# EAGLE board main_board (EAGLE 9.6.2), part 1 of 2
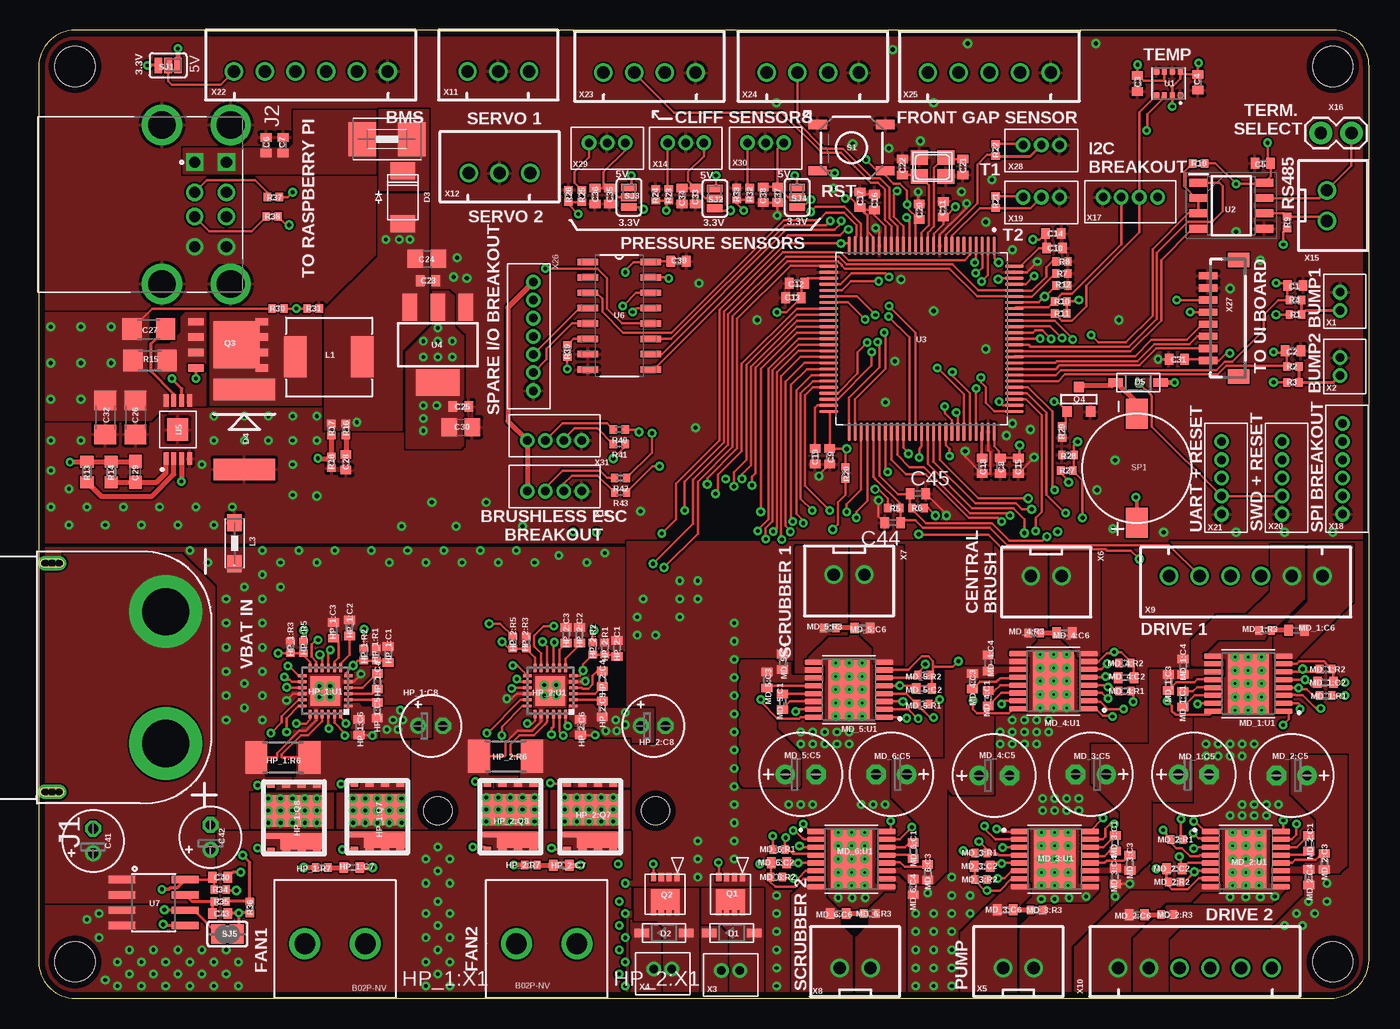
[diagram p0: board, top side]
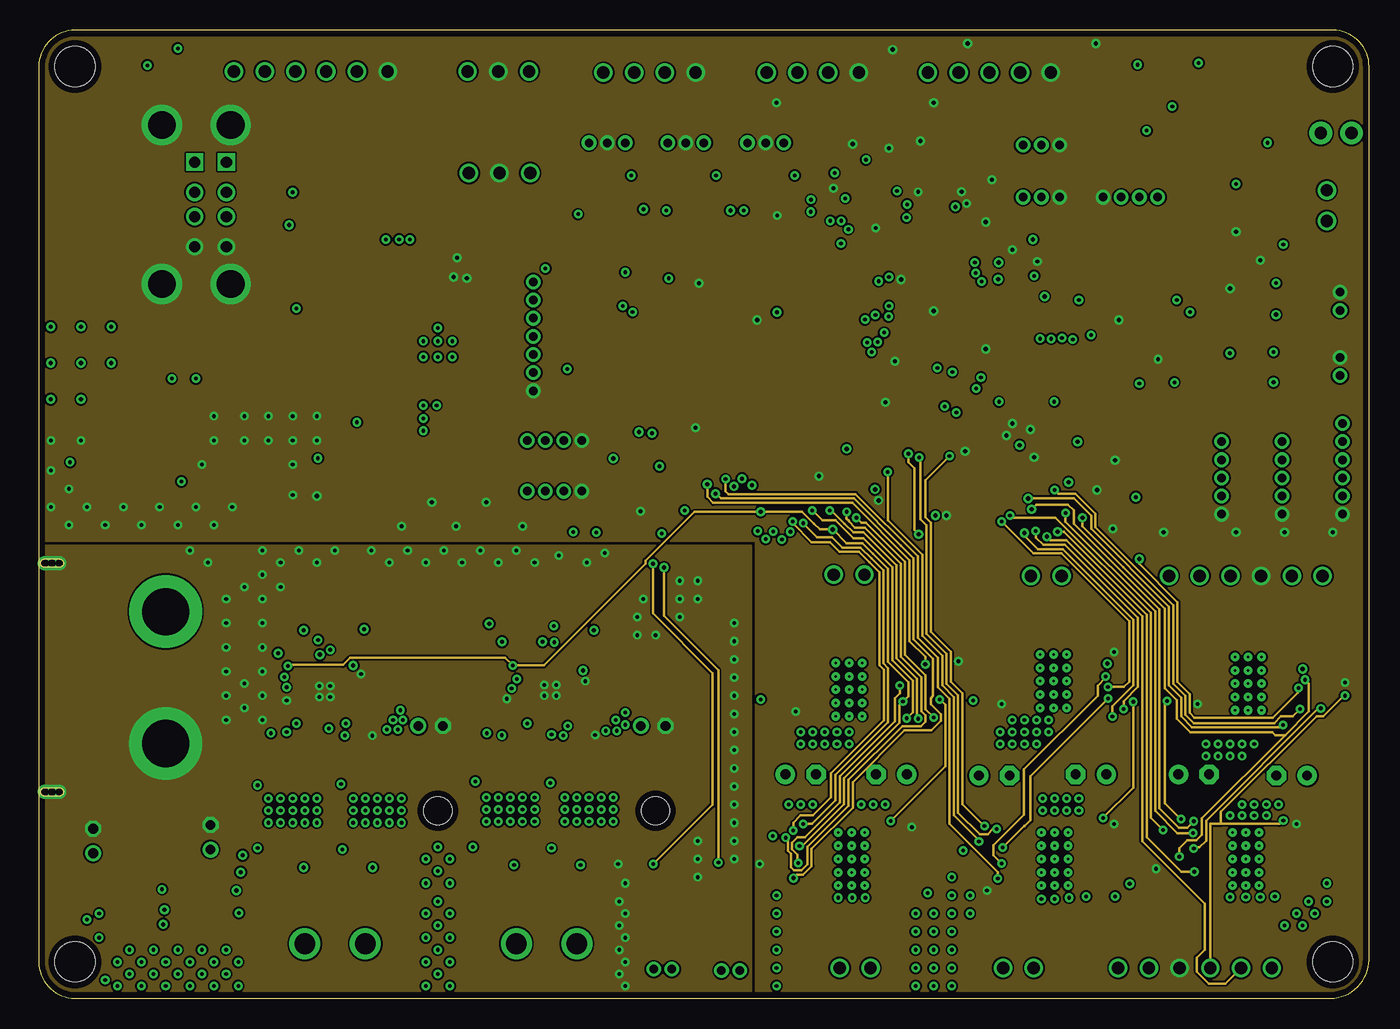
[diagram p1: board, inner layer L2_GND]
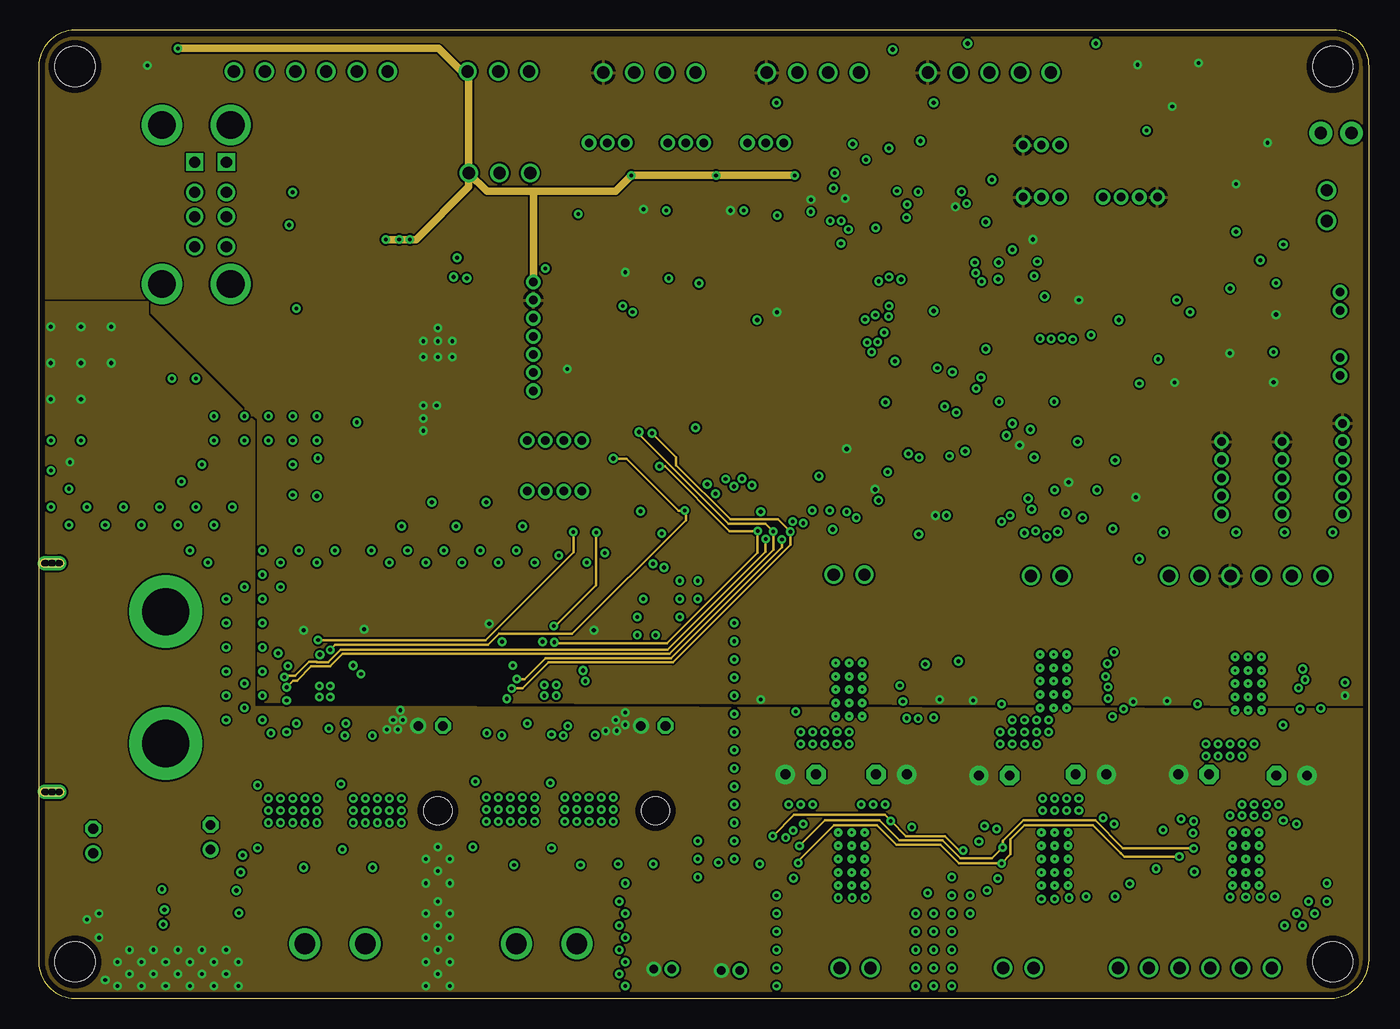
[diagram p2: board, inner layer L3_VCC]
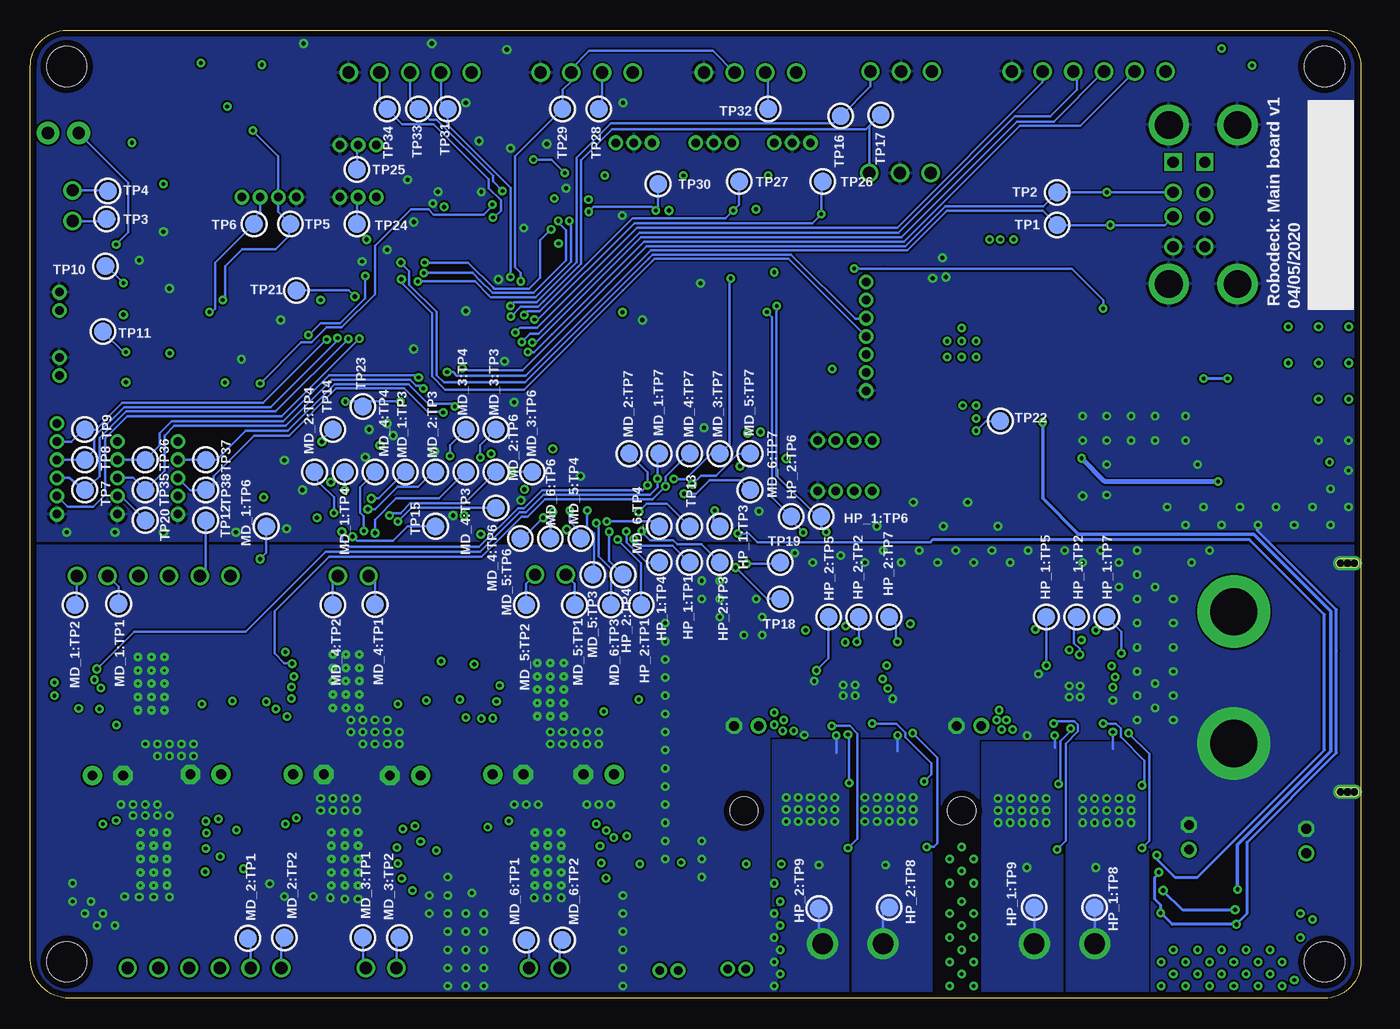
[diagram p3: board, bottom side, seen from below]

Size 110.01 x 80.01 mm. Coordinates in mm from the lower left corner, seen from the top.
Outline: 0,77.01 0,3.01 arc90 3,0.01 106.5,0.01 arc99 110,3.51 110,77.01 arc90 107,80.01 3,80.01 arc90 0,77.01
Copper layers (1+2*15+16): Top 0.035mm / dielectric 1.5mm / L2_GND 0.035mm / dielectric 0.15mm / L3_VCC 0.035mm / dielectric 0.2mm / Bottom 0.035mm
Design rules "default *": minimum track width 6mil, minimum drill 0.3mm, track to track 6mil, track to pad 6mil, pad to pad 6mil, via to via 6mil, smd to smd 6mil, copper to edge 20mil, drill to drill 6mil, minimum pad ring 10mil, minimum via ring 8mil, stop-mask expansion 4mil, vias tented up to drill 0.4mm, thermal gap 10mil
Holes 3.3 mm at 107,3.01 3,3.01 3,77.01 107,77.01
Holes 2.3 mm at 33,15.51 51,15.51

## Footprints (pad centres in the part's own frame; a part is rotated, then mirrored left to right if it is on the bottom)
C0402 = smd 0.7 x 0.9: 1 -0.65,0; 2 0.65,0
C0805 = smd 1.3 x 1.5: 1 -0.95,0; 2 0.95,0
C1206 = smd 1.6 x 1.8: 1 -1.4,0; 2 1.4,0
C0603 = smd 1.1 x 1: 1 -0.85,0; 2 0.85,0
E2-5 = drill 0.813 pad 1.27: + -1.016,0 | drill 0.813 pad 1.27 octagon: - 1.016,0
SOD-123 = smd 1.2 x 0.7: A 1.85,0; C -1.85,0
SOD-128 = smd 2 x 1.4: A 0,-2.2; K 0,2.2
SK104 = smd 1.778 x 5.08: 1 -3.302,0; 2 3.302,0
1812 = smd 2.286 x 2.794: 1 -2.046,0; 2 2.046,0
DFN-S-6X5-PP = smd 0.5 x 0.65: P$1 -2.725,1.905; P$2 -2.725,0.635; P$3 -2.725,-0.635; P$4 -2.725,-1.905; P$5 2.725,-1.905; P$6 2.725,-0.635; P$7 2.725,0.635; P$8 2.725,1.905 | smd 2.6 x 4.8: P$9 0.575,0 | smd 0.45 x 4.8: P$234A -1.488,0 | smd 1.3 x 3.5: P$234B -1.925,-0.65
R0402 = smd 0.6 x 0.7: 1 -0.5,0; 2 0.5,0
R2010 = smd 1.8 x 2.7: 1 -2.2,0; 2 2.2,0
TESTPOINT_ROUND_1.5MM = smd 1.5 x 1.5: P$1 0,0
QFN24-4X4 = smd 0.699 x 0.246: 1 -1.902,1.25; 2 -1.902,0.75; 3 -1.902,0.25; 4 -1.902,-0.25; 5 -1.902,-0.75; 6 -1.902,-1.25; 13 1.902,-1.25; 14 1.902,-0.75; 15 1.902,-0.25; 16 1.902,0.25; 17 1.902,0.75; 18 1.902,1.25 | smd 0.246 x 0.699: 7 -1.25,-1.902; 8 -0.75,-1.902; 9 -0.25,-1.902; 10 0.25,-1.902; 11 0.75,-1.902; 12 1.25,-1.902; 19 1.25,1.902; 20 0.75,1.902; 21 0.25,1.902; 22 -0.25,1.902; 23 -0.75,1.902; 24 -1.25,1.902 | smd 2.45 x 2.45: EXP 0,0
B02P-NV = drill 1.7: 1 -2.5,0; 2 2.5,0
XT-90-M-SIDE = drill 3.9 pad 6: 1 -5.45,0; 2 5.45,0 | drill 0.6: P$1 -9.45,-8.79; P$2 -9.45,-9.99; P$5 9.45,-8.79; P$6 9.45,-9.99 | drill 0.6 pad 1.2 long: P$3 -9.45,-9.4; P$4 9.45,-9.4
TE_1903815-1 = drill 0.92 square: 1 0,0; 5 0,2.62 | drill 0.92: 2 2.5,0; 3 4.5,0; 4 7,0; 6 2.5,2.62; 7 4.5,2.62; 8 7,2.62 | drill 2.3: P1 -3.07,2.97; P2 10.07,2.97; P3 -3.07,-2.71; P4 10.07,-2.71
SPM6530T-4R7M = smd 1.85 x 3.4: 1 -2.775,0; 2 2.775,0
WUERTH-ELEKTRONIK_1210 = smd 1.4 x 1.2: 1 -1.7,0; 2 1.7,0
E2,5-7 = drill 0.813 pad 1.6: + -1.27,0 | drill 0.813 pad 1.6 octagon: - 1.27,0
IC_TPS92641PWP/NOPB = smd 1.5 x 0.45: 1 -2.9,2.275; 2 -2.9,1.625; 3 -2.9,0.975; 4 -2.9,0.325; 5 -2.9,-0.325; 6 -2.9,-0.975; 7 -2.9,-1.625; 8 -2.9,-2.275; 9 2.9,-2.275; 10 2.9,-1.625; 11 2.9,-0.975; 12 2.9,-0.325; 13 2.9,0.325; 14 2.9,0.975; 15 2.9,1.625; 16 2.9,2.275 | smd 3.4 x 5: 17 0,0 | drill 0.2 pad 0.4: 18 -1.1,2.2; 19 0,2.2; 20 1.1,2.2; 21 -1.1,1.1; 22 0,1.1; 23 1.1,1.1; 24 -1.1,0; 25 0,0; 26 1.1,0; 27 -1.1,-1.1; 28 0,-1.1; 29 1.1,-1.1; 30 -1.1,-2.2; 31 0,-2.2; 32 1.1,-2.2
MLP8-33 = smd 0.42 x 0.45: D1 -0.975,1.525; D2 -0.325,1.525; D3 0.325,1.525; D4 0.975,1.525 | smd 2.37 x 1.7: DRAIN0 0,0.45 | smd 0.42 x 0.7: GATE 0.975,-1.4; S1 -0.975,-1.4; S2 -0.325,-1.4; S3 0.325,-1.4
SI7465 = smd 1.27 x 0.61: 1 0,1.905; 2 0,0.635; 3 0,-0.635; 4 0,-1.905 | smd 1.02 x 0.61: 5 5.465,-1.905; 6 5.465,-0.635; 7 5.465,0.635; 8 5.465,1.905 | smd 3.81 x 3.91: 9 3.36,0
SOT-23 = smd 0.787 x 0.889: D 0,1.016; G -0.965,-1.016; S 0.965,-1.016
R0603 = smd 1 x 1.1: 1 -0.85,0; 2 0.85,0
R1206 = smd 1.6 x 1.803: 1 -1.422,0; 2 1.422,0
TACTILE_SWITCH_SMD_5.2MM = smd 1.524 x 0.762: 1 -2.794,1.905; 2 2.794,1.905; 3 -2.794,-1.905; 4 2.794,-1.905
SPARKFUN-PASSIVES_PAD-HUMPER-3-1&2_NC_BY_PASTE_YES_SILK_FULL_BOX = smd 0.635 x 1.27: 1 -0.813,0; 2 0,0; 3 0.813,0
SOLDERJUMPER_REFLOW_NOPASTE = smd 1.168 x 1.6: 1 -0.762,0; 2 0.762,0
GSC9040YA-16R2700 = smd 1.8 x 2.5: P$2 0,4.5; P$3 0,-4.5
PSON65P250X250X100-8N = smd 0.49 x 0.45: 1 0.97,0.975; 2 0.97,0.325; 3 0.97,-0.325; 4 0.97,-0.975; 5 -0.97,-0.975; 6 -0.97,-0.325; 7 -0.97,0.325; 8 -0.97,0.975
SOIC127P600X175-8N = smd 1.528 x 0.65: 1 -2.711,1.905; 2 -2.711,0.635; 3 -2.711,-0.635; 4 -2.711,-1.905; 5 2.711,-1.905; 6 2.711,-0.635; 7 2.711,0.635; 8 2.711,1.905
QFP50P1600X1600X160-100N = smd 1.56 x 0.28: 1 -7.68,6; 2 -7.68,5.5; 3 -7.68,5; 4 -7.68,4.5; 5 -7.68,4; 6 -7.68,3.5; 7 -7.68,3; 8 -7.68,2.5; 9 -7.68,2; 10 -7.68,1.5; 11 -7.68,1; 12 -7.68,0.5; 13 -7.68,0; 14 -7.68,-0.5; 15 -7.68,-1; 16 -7.68,-1.5; 17 -7.68,-2; 18 -7.68,-2.5; 19 -7.68,-3; 20 -7.68,-3.5; 21 -7.68,-4; 22 -7.68,-4.5; 23 -7.68,-5; 24 -7.68,-5.5; 25 -7.68,-6; 51 7.68,-6; 52 7.68,-5.5; 53 7.68,-5; 54 7.68,-4.5; 55 7.68,-4; 56 7.68,-3.5; 57 7.68,-3; 58 7.68,-2.5; 59 7.68,-2; 60 7.68,-1.5; 61 7.68,-1; 62 7.68,-0.5; 63 7.68,0; 64 7.68,0.5; 65 7.68,1; 66 7.68,1.5; 67 7.68,2; 68 7.68,2.5; 69 7.68,3; 70 7.68,3.5; 71 7.68,4; 72 7.68,4.5; 73 7.68,5; 74 7.68,5.5; 75 7.68,6 | smd 0.28 x 1.56: 26 -6,-7.68; 27 -5.5,-7.68; 28 -5,-7.68; 29 -4.5,-7.68; 30 -4,-7.68; 31 -3.5,-7.68; 32 -3,-7.68; 33 -2.5,-7.68; 34 -2,-7.68; 35 -1.5,-7.68; 36 -1,-7.68; 37 -0.5,-7.68; 38 0,-7.68; 39 0.5,-7.68; 40 1,-7.68; 41 1.5,-7.68; 42 2,-7.68; 43 2.5,-7.68; 44 3,-7.68; 45 3.5,-7.68; 46 4,-7.68; 47 4.5,-7.68; 48 5,-7.68; 49 5.5,-7.68; 50 6,-7.68; 76 6,7.68; 77 5.5,7.68; 78 5,7.68; 79 4.5,7.68; 80 4,7.68; 81 3.5,7.68; 82 3,7.68; 83 2.5,7.68; 84 2,7.68; 85 1.5,7.68; 86 1,7.68; 87 0.5,7.68; 88 0,7.68; 89 -0.5,7.68; 90 -1,7.68; 91 -1.5,7.68; 92 -2,7.68; 93 -2.5,7.68; 94 -3,7.68; 95 -3.5,7.68; 96 -4,7.68; 97 -4.5,7.68; 98 -5,7.68; 99 -5.5,7.68; 100 -6,7.68
GEN_COMP_SOT223 = smd 1.219 x 2.235: 1 -2.311,-3.099; 2 0,-3.099; 3 2.311,-3.099 | smd 3.6 x 2.2: 4 0,3.099
LM5085 = smd 0.41 x 1.02: 1 -0.975,-2.4; 2 -0.325,-2.4; 3 0.325,-2.4; 4 0.975,-2.4; 5 0.975,2.4; 6 0.325,2.4; 7 -0.325,2.4; 8 -0.975,2.4 | smd 1.73 x 1.85: 9 0,0
SOIC127P600X175-16N = smd 1.702 x 0.533: 1 -2.591,4.445; 2 -2.591,3.175; 3 -2.591,1.905; 4 -2.591,0.635; 5 -2.591,-0.635; 6 -2.591,-1.905; 7 -2.591,-3.175; 8 -2.591,-4.445; 9 2.591,-4.445; 10 2.591,-3.175; 11 2.591,-1.905; 12 2.591,-0.635; 13 2.591,0.635; 14 2.591,1.905; 15 2.591,3.175; 16 2.591,4.445
SPARKFUN-SENSORS_SO08 = smd 0.61 x 2.21: 1 -1.905,-2.616; 2 -0.635,-2.616; 3 0.635,-2.616; 4 1.905,-2.616; 5 1.905,2.616; 6 0.635,2.616; 7 -0.635,2.616; 8 -1.905,2.616
B2B-ZR = drill 0.7 pad 1.1: 1 -0.75,-1.3; 2 0.75,-1.3
JST-XH-02 = drill 1.016: 1 -1.27,0; 2 1.27,0
JST-XH-06 = drill 1.016: 1 -6.35,0; 2 -3.81,0; 3 -1.27,0; 4 1.27,0; 5 3.81,0; 6 6.35,0
JST-XH-03 = drill 1.016: 1 -2.54,0; 2 0,0; 3 2.54,0
B4B-ZR = drill 0.7: 1 6,-1.3; 2 4.5,-1.3; 3 3,-1.3; 4 1.5,-1.3
B3B-ZR = drill 0.7 pad 1.1: 1 -1.5,0; 2 0,0; 3 1.5,0
1X02 = drill 1.016 pad 1.88: 1 0,0; 2 2.54,0
B6B-ZR = drill 0.7: 1 9,-1.3; 2 7.5,-1.3; 3 6,-1.3; 4 4.5,-1.3; 5 3,-1.3; 6 1.5,-1.3
B5B-ZR = drill 0.7: 1 7.5,-1.3; 2 6,-1.3; 3 4.5,-1.3; 4 3,-1.3; 5 1.5,-1.3
JST-XH-04 = drill 1.016: 1 -3.81,0; 2 -1.27,0; 3 1.27,0; 4 3.81,0
JST-XH-05 = drill 1.016: 1 -5.08,0; 2 -2.54,0; 3 0,0; 4 2.54,0; 5 5.08,0
B7B-ZR = drill 0.7: 1 10.5,-1.3; 2 9,-1.3; 3 7.5,-1.3; 4 6,-1.3; 5 4.5,-1.3; 6 3,-1.3; 7 1.5,-1.3
BM08B-SRSS-TB = smd 0.6 x 1.55: 1 3.5,-1.625; 2 2.5,-1.625; 3 1.5,-1.625; 4 0.5,-1.625; 5 -0.5,-1.625; 6 -1.5,-1.625; 7 -2.5,-1.625; 8 -3.5,-1.625 | smd 1.2 x 1.8: FIT@1 4.8,0.9; FIT@2 -4.8,0.9
NX3225 = smd 1.4 x 1.2: 1 -1.1,-0.8; 2 1.1,-0.8; 3 1.1,0.8; 4 -1.1,0.8

## Placement (x,y rotation side)
C1  100nF  [C0402]  103.9,58.91 0 top
C2  100nF  [C0402]  103.7,53.51 0 top
C3  100nF  [C0402]  90.85,75.61 270 top
C4  100nF  [C0402]  95.85,75.71 270 top
C5  100nF  [C0402]  101.2,69.01 180 top
C6  10uF  [C0402]  18.8,70.51 270 top
C7  1uF  [C0402]  20.2,70.51 270 top
C8  100nF  [C0402]  79.5,44.01 270 top
C9  100nF  [C0402]  65.4,44.81 270 top
C10  100nF  [C0402]  84,62.01 0 top
C11  100nF  [C0402]  74.8,65.21 90 top
C12  100nF  [C0402]  62.7,59.11 180 top
C13  100nF  [C0402]  62.4,57.91 180 top
C14  1uF  [C0402]  83.9,63.21 0 top
C15  1uF  [C0402]  81,44.01 270 top
C16  100nF  [C0402]  69.1,65.81 90 top
C17  1uF  [C0402]  67.9,66.01 90 top
C18  2.2uF  [C0402]  78,44.01 270 top
C19  2.2uF  [C0402]  64.2,44.81 270 top
C20  100nF  [C0402]  72.8,65.01 90 top
C21  22pF  [C0402]  76.4,68.71 90 top
C22  22pF  [C0402]  71.4,68.71 270 top
C23  100nF  [C0402]  32.2,59.31 0 top
C24  10uF  [C0805]  32.1,61.11 0 top
C25  100nF  [C0402]  34.9,48.91 0 top
C26  47uF  [C1206]  8,48.01 270 top
C27  0.47uF  [C1206]  9.1,55.31 0 top
C28  100nF  [C0402]  25.4,44.31 90 top
C29  1nF  [C0603]  8,43.51 90 top
C30  10uF  [C0805]  34.9,47.21 0 top
C31  100nF  [C0402]  94.1,52.81 0 top
C32  1uF  [C1206]  5.5,48.01 270 top
C33  100nF  [C0402]  54.3,66.31 270 top
C34  1uF  [C0402]  53.2,66.31 270 top
C35  100nF  [C0402]  47.2,66.31 270 top
C36  1uF  [C0402]  46,66.31 270 top
C37  100nF  [C0402]  61.1,66.41 270 top
C38  1uF  [C0402]  59.9,66.41 270 top
C39  100nF  [C0402]  52.9,60.91 180 top
C40  100nF  [C0402]  15,10.01 0 top
C41  330uF/50V  [E2-5]  4.5,13.01 90 top
C42  4.7uF/50V  [E2-5]  14.2,13.31 90 top
C43  10nF  [C0402]  15,7.01 0 top
C44  50pF  [C0402]  70.6,39.31 180 top
C45  50pF  [C0402]  72.7,41.71 0 top
D1  SBR3U40P1-7  [SOD-123]  57.3,5.41 0 top
D2  SBR3U40P1-7  [SOD-123]  51.7,5.41 0 top
D3  PMEG3030EP  [SOD-128]  30.1,66.21 0 top
D4  SK104  [SK104]  17,47.01 90 top
D5  MBR120  [SOD-123]  90.9,50.91 180 top
F1  TLC-MSMD250/16  [1812]  28.8,71.01 180 top
HP_1:C1  1uF  [C0402]  28.9,28.41 90 top
HP_1:C2  1uF  [C0402]  25.7,30.61 90 top
HP_1:C3  1uF  [C0402]  24.4,30.41 90 top
HP_1:C4  100nF  [C0402]  28,26.21 90 top
HP_1:C5  1uF  [C0402]  28,23.81 270 top
HP_1:C6  100nF  [C0402]  26.5,22.41 270 top
HP_1:C7  10nF  [C0402]  25.9,10.81 180 top
HP_1:C8  4.7uF/50V  [E2-5]  32.4,22.51 0 top
HP_1:Q7  AON6978  [DFN-S-6X5-PP]  28,15.01 90 top
HP_1:Q8  AON6978  [DFN-S-6X5-PP]  21.1,14.91 90 top
HP_1:R1  47k  [R0402]  27.9,28.41 270 top
HP_1:R2  300k  [R0402]  26.9,28.41 90 top
HP_1:R3  DNP  [R0402]  20.8,29.01 270 top
HP_1:R5  68k  [R0402]  21.9,29.01 90 top
HP_1:R6  0R005  [R2010]  20.2,19.91 0 top
HP_1:R7  1R  [R0402]  23.4,10.81 180 top
HP_1:TP1  [TESTPOINT_ROUND_1.5MM]  55.5,36.01 90 bottom
HP_1:TP2  [TESTPOINT_ROUND_1.5MM]  23.5,31.51 90 bottom
HP_1:TP3  [TESTPOINT_ROUND_1.5MM]  53,39.01 90 bottom
HP_1:TP4  [TESTPOINT_ROUND_1.5MM]  58,36.01 90 bottom
HP_1:TP5  [TESTPOINT_ROUND_1.5MM]  26,31.51 90 bottom
HP_1:TP6  [TESTPOINT_ROUND_1.5MM]  44.6,39.81 90 bottom
HP_1:TP7  [TESTPOINT_ROUND_1.5MM]  21,31.51 90 bottom
HP_1:TP8  [TESTPOINT_ROUND_1.5MM]  22,7.51 90 bottom
HP_1:TP9  [TESTPOINT_ROUND_1.5MM]  27,7.51 90 bottom
HP_1:U1  DRV8701P  [QFN24-4X4]  23.7,25.41 180 top
HP_1:X1  B02P-NV  [B02P-NV]  24.5,4.51 0 top
HP_2:C1  1uF  [C0402]  47.8,28.91 90 top
HP_2:C2  1uF  [C0402]  44.7,30.01 90 top
HP_2:C3  1uF  [C0402]  43.6,30.01 90 top
HP_2:C4  100nF  [C0402]  46.6,26.41 90 top
HP_2:C5  1uF  [C0402]  46.6,23.91 270 top
HP_2:C6  100nF  [C0402]  44.8,22.41 270 top
HP_2:C7  10nF  [C0402]  43.2,11.01 180 top
HP_2:C8  4.7uF/50V  [E2-5]  50.8,22.51 0 top
HP_2:Q7  AON6978  [DFN-S-6X5-PP]  45.6,15.01 90 top
HP_2:Q8  AON6978  [DFN-S-6X5-PP]  39,15.01 90 top
HP_2:R1  47k  [R0402]  46.8,28.91 270 top
HP_2:R2  300k  [R0402]  45.8,28.91 90 top
HP_2:R3  DNP  [R0402]  40.3,29.41 270 top
HP_2:R5  68k  [R0402]  39.2,29.41 90 top
HP_2:R6  0R005  [R2010]  38.6,20.01 0 top
HP_2:R7  1R  [R0402]  40.7,11.01 180 top
HP_2:TP1  [TESTPOINT_ROUND_1.5MM]  59.5,32.51 270 bottom
HP_2:TP2  [TESTPOINT_ROUND_1.5MM]  41.5,31.51 270 bottom
HP_2:TP3  [TESTPOINT_ROUND_1.5MM]  53,36.01 270 bottom
HP_2:TP4  [TESTPOINT_ROUND_1.5MM]  61,35.01 270 bottom
HP_2:TP5  [TESTPOINT_ROUND_1.5MM]  44,31.51 270 bottom
HP_2:TP6  [TESTPOINT_ROUND_1.5MM]  47.1,39.81 270 bottom
HP_2:TP7  [TESTPOINT_ROUND_1.5MM]  39,31.51 270 bottom
HP_2:TP8  [TESTPOINT_ROUND_1.5MM]  39,7.51 270 bottom
HP_2:TP9  [TESTPOINT_ROUND_1.5MM]  44.8,7.41 270 bottom
HP_2:U1  DRV8701P  [QFN24-4X4]  42.3,25.41 180 top
HP_2:X1  B02P-NV  [B02P-NV]  42,4.51 0 top
J1  XT-90-M  [XT-90-M-SIDE]  10.5,26.51 270 top
J2  USB_A_2  [TE_1903815-1]  12.9,69.11 270 top
L1  SPM6530T-4R7M  [SPM6530T-4R7M]  24,53.01 0 top
L3  [WUERTH-ELEKTRONIK_1210]  16.2,37.61 270 top
MD_1:C1  22nF  [C0402]  94.6,24.71 270 top
MD_1:C2  1uF  [C0402]  106.4,26.11 0 top
MD_1:C3  100nF  [C0402]  93.4,26.11 270 top
MD_1:C4  100nF  [C0402]  94.6,27.41 90 top
MD_1:C5  100uF  [E2,5-7]  95.5,18.51 0 top
MD_1:C6  22nF  [C0402]  104,30.41 180 top
MD_1:R1  10k  [R0402]  106.4,25.01 0 top
MD_1:R2  1.65k  [R0402]  106.4,27.21 0 top
MD_1:R3  50  [R0402]  101.4,30.41 180 top
MD_1:TP1  [TESTPOINT_ROUND_1.5MM]  102.7,32.61 270 bottom
MD_1:TP2  [TESTPOINT_ROUND_1.5MM]  106.3,32.51 270 bottom
MD_1:TP3  [TESTPOINT_ROUND_1.5MM]  79,43.51 90 bottom
MD_1:TP4  [TESTPOINT_ROUND_1.5MM]  84,43.51 90 bottom
MD_1:TP6  [TESTPOINT_ROUND_1.5MM]  90.5,39.01 90 bottom
MD_1:TP7  [TESTPOINT_ROUND_1.5MM]  58,45.01 90 bottom
MD_1:U1  DRV8876  [IC_TPS92641PWP/NOPB]  100,26.01 180 top
MD_2:C1  22nF  [C0402]  105,12.81 90 top
MD_2:C2  1uF  [C0402]  93.9,10.71 180 top
MD_2:C3  100nF  [C0402]  106.3,11.31 90 top
MD_2:C4  100nF  [C0402]  105,10.01 270 top
MD_2:C5  100uF  [E2,5-7]  103.6,18.41 180 top
MD_2:C6  22nF  [C0402]  90.8,6.91 0 top
MD_2:R1  10k  [R0402]  94.1,13.11 0 top
MD_2:R2  1.65k  [R0402]  93.9,9.61 180 top
MD_2:R3  50  [R0402]  93.3,6.91 0 top
MD_2:TP1  [TESTPOINT_ROUND_1.5MM]  92,4.96 90 bottom
MD_2:TP2  [TESTPOINT_ROUND_1.5MM]  89,5.01 90 bottom
MD_2:TP3  [TESTPOINT_ROUND_1.5MM]  76.5,43.51 90 bottom
MD_2:TP4  [TESTPOINT_ROUND_1.5MM]  86.5,43.51 90 bottom
MD_2:TP6  [TESTPOINT_ROUND_1.5MM]  71.5,43.51 90 bottom
MD_2:TP7  [TESTPOINT_ROUND_1.5MM]  60.5,45.01 90 bottom
MD_2:U1  DRV8876  [IC_TPS92641PWP/NOPB]  99.8,11.51 0 top
MD_3:C1  22nF  [C0402]  89,12.81 90 top
MD_3:C2  1uF  [C0402]  78,10.91 180 top
MD_3:C3  100nF  [C0402]  90.2,11.21 90 top
MD_3:C4  100nF  [C0402]  89,10.11 270 top
MD_3:C5  100uF  [E2,5-7]  87,18.51 180 top
MD_3:C6  22nF  [C0402]  79.9,7.31 0 top
MD_3:R1  10k  [R0402]  77.9,12.01 180 top
MD_3:R2  1.65k  [R0402]  77.9,9.81 180 top
MD_3:R3  50  [R0402]  82.5,7.31 0 top
MD_3:TP1  [TESTPOINT_ROUND_1.5MM]  82.5,5.01 90 bottom
MD_3:TP2  [TESTPOINT_ROUND_1.5MM]  79.5,5.01 90 bottom
MD_3:TP3  [TESTPOINT_ROUND_1.5MM]  71.5,47.01 270 bottom
MD_3:TP4  [TESTPOINT_ROUND_1.5MM]  74,47.01 270 bottom
MD_3:TP6  [TESTPOINT_ROUND_1.5MM]  68.5,43.51 270 bottom
MD_3:TP7  [TESTPOINT_ROUND_1.5MM]  53,45.01 270 bottom
MD_3:U1  DRV8876  [IC_TPS92641PWP/NOPB]  84,11.51 0 top
MD_4:C1  22nF  [C0402]  78.5,24.81 270 top
MD_4:C2  1uF  [C0402]  89.9,26.51 0 top
MD_4:C3  100nF  [C0402]  77.2,26.21 270 top
MD_4:C4  100nF  [C0402]  78.5,27.71 90 top
MD_4:C5  100uF  [E2,5-7]  79,18.41 0 top
MD_4:C6  22nF  [C0402]  84.8,30.21 180 top
MD_4:R1  10k  [R0402]  89.8,25.41 0 top
MD_4:R2  1.65k  [R0402]  89.8,27.71 0 top
MD_4:R3  50  [R0402]  82.3,30.21 180 top
MD_4:TP1  [TESTPOINT_ROUND_1.5MM]  81.5,32.56 270 bottom
MD_4:TP2  [TESTPOINT_ROUND_1.5MM]  85,32.51 270 bottom
MD_4:TP3  [TESTPOINT_ROUND_1.5MM]  74,43.51 90 bottom
MD_4:TP4  [TESTPOINT_ROUND_1.5MM]  81.5,43.51 90 bottom
MD_4:TP6  [TESTPOINT_ROUND_1.5MM]  71.5,40.51 90 bottom
MD_4:TP7  [TESTPOINT_ROUND_1.5MM]  55.5,45.01 90 bottom
MD_4:U1  DRV8876  [IC_TPS92641PWP/NOPB]  83.9,26.21 180 top
MD_5:C1  22nF  [C0402]  61.5,24.51 270 top
MD_5:C2  1uF  [C0402]  73.2,25.61 0 top
MD_5:C3  100nF  [C0402]  60.2,26.31 270 top
MD_5:C4  100nF  [C0402]  61.5,27.81 90 top
MD_5:C5  100uF  [E2,5-7]  63,18.51 0 top
MD_5:C6  22nF  [C0402]  68.1,30.61 180 top
MD_5:R1  10k  [R0402]  73.1,24.31 0 top
MD_5:R2  1.65k  [R0402]  73.2,26.71 0 top
MD_5:R3  50  [R0402]  65.4,30.61 180 top
MD_5:TP1  [TESTPOINT_ROUND_1.5MM]  65,32.51 270 bottom
MD_5:TP2  [TESTPOINT_ROUND_1.5MM]  69,32.51 270 bottom
MD_5:TP3  [TESTPOINT_ROUND_1.5MM]  63.5,35.01 270 bottom
MD_5:TP4  [TESTPOINT_ROUND_1.5MM]  64.5,38.01 270 bottom
MD_5:TP6  [TESTPOINT_ROUND_1.5MM]  69.5,38.01 270 bottom
MD_5:TP7  [TESTPOINT_ROUND_1.5MM]  50.5,45.01 270 bottom
MD_5:U1  DRV8876  [IC_TPS92641PWP/NOPB]  67,25.51 180 top
MD_6:C1  22nF  [C0402]  72.3,12.21 90 top
MD_6:C2  1uF  [C0402]  61.2,11.21 180 top
MD_6:C3  100nF  [C0402]  73.5,10.41 90 top
MD_6:C4  100nF  [C0402]  72.3,9.21 270 top
MD_6:C5  100uF  [E2,5-7]  70.5,18.51 180 top
MD_6:C6  22nF  [C0402]  66.1,7.01 0 top
MD_6:R1  10k  [R0402]  61.2,12.31 180 top
MD_6:R2  1.65k  [R0402]  61,10.01 180 top
MD_6:R3  50  [R0402]  68.7,7.01 0 top
MD_6:TP1  [TESTPOINT_ROUND_1.5MM]  69,4.81 270 bottom
MD_6:TP2  [TESTPOINT_ROUND_1.5MM]  66,4.81 270 bottom
MD_6:TP3  [TESTPOINT_ROUND_1.5MM]  62,32.51 270 bottom
MD_6:TP4  [TESTPOINT_ROUND_1.5MM]  58,39.01 270 bottom
MD_6:TP6  [TESTPOINT_ROUND_1.5MM]  67,38.01 270 bottom
MD_6:TP7  [TESTPOINT_ROUND_1.5MM]  50.5,42.01 270 bottom
MD_6:U1  DRV8876  [IC_TPS92641PWP/NOPB]  67.2,11.51 0 top
Q1  IRLHM630TRPBF  [MLP8-33]  57.2,8.61 180 top
Q2  IRLHM630TRPBF  [MLP8-33]  51.8,8.61 180 top
Q3  SI7465DP  [SI7465]  13,54.01 0 top
Q4  DMG2302  [SOT-23]  86,49.51 0 top
R1  10k  [R0402]  103.9,56.51 180 top
R2  10k  [R0402]  103.7,52.21 180 top
R3  10k  [R0402]  103.7,50.91 180 top
R4  10k  [R0402]  103.9,57.71 180 top
R5  10k  [R0402]  70.7,40.51 0 top
R6  10k  [R0402]  72.7,40.51 180 top
R7  10k  [R0402]  84.6,59.91 0 top
R8  10k  [R0402]  84.6,60.91 0 top
R9  120  [R0402]  103.2,64.11 90 top
R10  4.7k  [R0402]  84.5,57.61 0 top
R11  4.7k  [R0402]  84.5,56.61 0 top
R12  10k  [R0402]  84.6,58.91 180 top
R13  40.2k  [R0603]  4,43.51 270 top
R14  200  [R0603]  6,43.51 90 top
R15  0.001ohm  [R1206]  9.2,52.71 180 top
R16  200  [R0402]  25.4,47.01 90 top
R17  10k  [R0402]  24.2,47.01 90 top
R18  3.09k  [R0402]  24.2,44.31 90 top
R19  DNP  [R0402]  95.9,69.01 180 top
R20  10k  [R0402]  66.7,43.41 90 top
R21  10k  [R0402]  79.1,65.81 90 top
R22  10k  [R0402]  79.1,70.11 90 top
R23  0R  [R0402]  52.1,66.41 90 top
R24  DNP  [R0402]  51,66.41 270 top
R25  0R  [R0402]  44.9,66.31 90 top
R26  DNP  [R0402]  43.8,66.31 270 top
R27  0  [R0402]  85,43.61 0 top
R28  DNP  [R0402]  85.1,44.91 180 top
R29  10k  [R0402]  84.6,46.81 270 top
R30  68k  [R0402]  19.8,57.01 180 top
R31  10k  [R0402]  22.7,57.01 180 top
R32  0R  [R0402]  58.8,66.51 90 top
R33  DNP  [R0402]  57.7,66.51 270 top
R34  10k  [R0402]  15,9.01 180 top
R35  10k  [R0402]  15,8.01 180 top
R36  20k  [R0402]  17.45,7.51 90 top
R37  0  [R0402]  19.4,66.21 180 top
R38  0  [R0402]  19.3,64.61 180 top
R39  10k  [R0402]  43.7,53.51 270 top
R40  DNP  [R0402]  48,47.01 180 top
R41  DNP  [R0402]  48,45.81 180 top
R42  DNP  [R0402]  48.1,43.01 180 top
R43  DNP  [R0402]  48.1,41.81 180 top
S1  RESET  [TACTILE_SWITCH_SMD_5.2MM]  67.2,70.31 180 top
SJ1  SPARKFUN-PASSIVES_JUMPER_PAD-3-1&2_NC_BY_PASTE  [SPARKFUN-PASSIVES_PAD-HUMPER-3-1&2_NC_BY_PASTE_YES_SILK_FULL_BOX]  10.7,77.11 180 top
SJ2  SPARKFUN-PASSIVES_JUMPER_PAD-3-1&2_NC_BY_PASTE  [SPARKFUN-PASSIVES_PAD-HUMPER-3-1&2_NC_BY_PASTE_YES_SILK_FULL_BOX]  55.9,66.11 270 top
SJ3  SPARKFUN-PASSIVES_JUMPER_PAD-3-1&2_NC_BY_PASTE  [SPARKFUN-PASSIVES_PAD-HUMPER-3-1&2_NC_BY_PASTE_YES_SILK_FULL_BOX]  48.8,66.21 270 top
SJ4  SPARKFUN-PASSIVES_JUMPER_PAD-3-1&2_NC_BY_PASTE  [SPARKFUN-PASSIVES_PAD-HUMPER-3-1&2_NC_BY_PASTE_YES_SILK_FULL_BOX]  62.7,66.21 270 top
SJ5  [SOLDERJUMPER_REFLOW_NOPASTE]  15.6,5.31 0 top
SP1  GSC9040YA-16R2700  [GSC9040YA-16R2700]  90.8,43.81 0 top
TP1  [TESTPOINT_ROUND_1.5MM]  25.1,63.91 180 bottom
TP2  [TESTPOINT_ROUND_1.5MM]  25.1,66.61 90 bottom
TP3  [TESTPOINT_ROUND_1.5MM]  103.7,64.41 0 bottom
TP4  [TESTPOINT_ROUND_1.5MM]  103.6,66.71 0 bottom
TP5  [TESTPOINT_ROUND_1.5MM]  88.5,64.01 180 bottom
TP6  [TESTPOINT_ROUND_1.5MM]  91.5,64.01 180 bottom
TP7  [TESTPOINT_ROUND_1.5MM]  105.5,42.01 90 bottom
TP8  [TESTPOINT_ROUND_1.5MM]  105.5,44.51 90 bottom
TP9  [TESTPOINT_ROUND_1.5MM]  105.5,47.01 90 bottom
TP10  [TESTPOINT_ROUND_1.5MM]  103.8,60.51 90 bottom
TP11  [TESTPOINT_ROUND_1.5MM]  104,55.11 90 bottom
TP12  [TESTPOINT_ROUND_1.5MM]  95.5,39.51 90 bottom
TP13  [TESTPOINT_ROUND_1.5MM]  55.5,39.01 0 bottom
TP14  [TESTPOINT_ROUND_1.5MM]  85,47.01 0 bottom
TP15  [TESTPOINT_ROUND_1.5MM]  76.5,39.01 90 bottom
TP16  [TESTPOINT_ROUND_1.5MM]  43,72.91 90 bottom
TP17  [TESTPOINT_ROUND_1.5MM]  39.7,73.01 90 bottom
TP18  [TESTPOINT_ROUND_1.5MM]  48,33.01 90 bottom
TP19  [TESTPOINT_ROUND_1.5MM]  48,36.01 90 bottom
TP20  [TESTPOINT_ROUND_1.5MM]  100.5,39.51 90 bottom
TP21  [TESTPOINT_ROUND_1.5MM]  88,58.51 90 bottom
TP22  [TESTPOINT_ROUND_1.5MM]  29.8,47.71 0 bottom
TP23  [TESTPOINT_ROUND_1.5MM]  82.5,48.91 0 bottom
TP24  [TESTPOINT_ROUND_1.5MM]  83,64.01 0 bottom
TP25  [TESTPOINT_ROUND_1.5MM]  83,68.51 0 bottom
TP26  [TESTPOINT_ROUND_1.5MM]  44.5,67.51 0 bottom
TP27  [TESTPOINT_ROUND_1.5MM]  51.4,67.51 180 bottom
TP28  [TESTPOINT_ROUND_1.5MM]  63,73.51 0 bottom
TP29  [TESTPOINT_ROUND_1.5MM]  66,73.51 0 bottom
TP30  [TESTPOINT_ROUND_1.5MM]  58.1,67.31 0 bottom
TP31  [TESTPOINT_ROUND_1.5MM]  75.5,73.51 0 bottom
TP32  [TESTPOINT_ROUND_1.5MM]  49,73.51 0 bottom
TP33  [TESTPOINT_ROUND_1.5MM]  77.9,73.51 0 bottom
TP34  [TESTPOINT_ROUND_1.5MM]  80.5,73.51 0 bottom
TP35  [TESTPOINT_ROUND_1.5MM]  100.5,42.01 270 bottom
TP36  [TESTPOINT_ROUND_1.5MM]  100.5,44.51 270 bottom
TP37  [TESTPOINT_ROUND_1.5MM]  95.5,44.51 270 bottom
TP38  [TESTPOINT_ROUND_1.5MM]  95.5,42.01 270 bottom
U1  BME280  [PSON65P250X250X100-8N]  93.4,75.61 270 top
U2  SN65HVD75DR  [SOIC127P600X175-8N]  98.6,65.51 0 top
U3  STM32F407VGT6  [QFP50P1600X1600X160-100N]  73,54.51 270 top
U4  AP2114H-3.3V- 1A  [GEN_COMP_SOT223]  33,54.01 180 top
U5  LM5085  [LM5085]  11.5,47.01 0 top
U6  74HC4051D  [SOIC127P600X175-16N]  48,56.41 0 top
U7  ACS723LLCTR-40AU (0-40A)  [SPARKFUN-SENSORS_SO08]  9.5,7.91 270 top
X1  B2B-ZR  [B2B-ZR]  106.3,57.61 90 top
X2  B2B-ZR  [B2B-ZR]  106.3,52.21 90 top
X3  B2B-ZR  [B2B-ZR]  57.2,3.61 0 top
X4  B2B-ZR  [B2B-ZR]  51.6,3.71 0 top
X5  JST-XH-02  [JST-XH-02]  81,2.51 0 top
X6  JST-XH-02  [JST-XH-02]  83.3,34.91 180 top
X7  JST-XH-02  [JST-XH-02]  67,35.01 180 top
X8  JST-XH-02  [JST-XH-02]  67.5,2.51 0 top
X9  JST-XH-06  [JST-XH-06]  99.8,34.91 180 top
X10  JST-XH-06  [JST-XH-06]  95.6,2.51 0 top
X11  JST-XH-03  [JST-XH-03]  38,76.61 0 top
X12  JST-XH-03  [JST-XH-03]  38.1,68.21 0 top
X13  B4B-ZR  [B4B-ZR]  46.4,40.61 180 top
X14  B3B-ZR  [B3B-ZR]  53.5,70.71 0 top
X15  JST-XH-02  [JST-XH-02]  106.5,65.51 270 top
X16  [1X02]  106,71.51 0 top
X17  B4B-ZR  [B4B-ZR]  86.5,67.51 0 top
X18  B6B-ZR  [B6B-ZR]  106.5,38.51 90 top
X19  B3B-ZR  [B3B-ZR]  82.9,66.21 0 top
X20  B5B-ZR  [B5B-ZR]  101.5,38.51 90 top
X21  B5B-ZR  [B5B-ZR]  96.5,38.51 90 top
X22  JST-XH-06  [JST-XH-06]  22.5,76.61 0 top
X23  JST-XH-04  [JST-XH-04]  50.5,76.51 0 top
X24  JST-XH-04  [JST-XH-04]  64,76.51 0 top
X25  JST-XH-05  [JST-XH-05]  78.6,76.51 0 top
X26  B7B-ZR  [B7B-ZR]  42.2,60.71 270 top
X27  BM08B-SRSS-TB  [BM08B-SRSS-TB]  98.3,56.21 270 top
X28  B3B-ZR  [B3B-ZR]  82.9,70.51 0 top
X29  B3B-ZR  [B3B-ZR]  47,70.71 0 top
X30  B3B-ZR  [B3B-ZR]  60.1,70.71 0 top
X31  B4B-ZR  [B4B-ZR]  46.4,44.81 180 top
XTAL1  25MHz  [NX3225]  73.9,68.71 180 top

## Library data of the parts
C1-C45 HP_1:C8 HP_2:C8 MD_1:C1-MD_1:C6 MD_2:C1-MD_2:C6 MD_3:C1-MD_3:C6 MD_4:C1-MD_4:C6 MD_5:C1-MD_5:C6 MD_6:C1-MD_6:C6 = rcl; SPICEPREFIX: C
D1 D2 D5 F1 XTAL1 = adafruit
D3 = diodes
D4 L1 Q3 U5 = Neptune_custom_lib
HP_1:C1-HP_1:C7 HP_2:C1-HP_2:C7 = rcl
HP_1:Q7 HP_1:Q8 HP_2:Q7 HP_2:Q8 = AON6978
HP_1:R1-HP_1:R3 HP_1:R5 HP_1:R7 HP_2:R1-HP_2:R3 HP_2:R5 HP_2:R7 MD_1:R1-MD_1:R3 MD_2:R1-MD_2:R3 MD_3:R1-MD_3:R3 MD_4:R1-MD_4:R3 MD_5:R1-MD_5:R3 MD_6:R1-MD_6:R3 R1-R43 = rcl; SPICEPREFIX: R
HP_1:R6 HP_2:R6 = rcl; PN: PMR50HZPFU5L00; POWER: 1W; TOL: 1%
HP_1:TP1-HP_1:TP9 HP_2:TP1-HP_2:TP9 MD_1:TP1-MD_1:TP4 MD_1:TP6 MD_1:TP7 MD_2:TP1-MD_2:TP4 MD_2:TP6 MD_2:TP7 MD_3:TP1-MD_3:TP4 MD_3:TP6 MD_3:TP7 MD_4:TP1-MD_4:TP4 MD_4:TP6 MD_4:TP7 MD_5:TP1-MD_5:TP4 MD_5:TP6 MD_5:TP7 MD_6:TP1-MD_6:TP4 MD_6:TP6 MD_6:TP7 SJ5 TP1-TP38 = microbuilder
HP_1:U1 HP_2:U1 = DRV8701
HP_1:X1 HP_2:X1 = con-jst-nv
J1 = con-XT
J2 = USB_con; AVAILABILITY: Unavailable; COMMENT: 1903815-1; COMPATIBLE_PARTS: keystone 922, lcsc C2341; DESCRIPTION: Conn USB 2.0 Type A RCP 4/4 POS 2.5mm Solder RA Thru-Hole 8 Terminal 2 Port Tray; MF: TE Connectivity; MP: 1903815-1; PACKAGE: None; PRICE: None; TE_PURCHASE_URL: https://www.te.com/usa-en/product-1903815-1.html?te_bu=Cor&te_type=disp&te_campaign=seda_glo_cor-seda-global-disp-prtnr-fy19-seda-model-bom-cta_sma-317_1&elqCampaignId=32493
L3 = Lockbird_Laser_001
MD_1:U1 MD_2:U1 MD_3:U1 MD_4:U1 MD_5:U1 MD_6:U1 = DRV8876
Q1 Q2 Q4 = MOSFET
S1 = SparkFun-Switches; PROD_ID: SWCH-08247; SF_SKU: COM-08720
SJ1-SJ4 = SparkFun_MPU-9250_Breakout
SP1 = EasyCheck
U1 = BME280; AVAILABILITY: Unavailable; DESCRIPTION: Humidity Temperature Sensor 0 ~ 100% RH I²C, SPI ±3% 1s Surface Mount; MF: Bosch; MP: BME280; PACKAGE: LGA-8 Bosch; PRICE: None
U2 = SN65HVD75DR; AVAILABILITY: Unavailable; DESCRIPTION: 1/1 Transceiver Half RS422, RS485 8-SOIC; MF: Texas Instruments; MP: SN65HVD75DR; PACKAGE: SOIC-8 Texas Instruments; PRICE: None
U3 = STM32F407VGT6; AVAILABILITY: Unavailable; DESCRIPTION: ARM® Cortex®-M4 STM32F4 Microcontroller IC 32-Bit 168MHz 1MB _1M x 8_ FLASH 100-LQFP _14x14_; MF: STMicroelectronics; MP: STM32F407VGT6; PACKAGE: LQFP-100 STMicroelectronics; PRICE: None
U4 = Arduino_Micro
U6 = 74HC4051D; AVAILABILITY: Unavailable; DESCRIPTION: 1 Circuit IC Switch 8:1 130Ohm 16-SOIC; MF: Toshiba; MP: 74HC4051D; PACKAGE: SOIC-16 Toshiba; PRICE: None
U7 = SparkFun_ACS723_Current_Sensor_Breakout; PART_#: ACS723ACS723LLCTR-05AB-T2; PROD_ID: IC-13872
X1-X4 X13 X14 X17-X21 X26 X28-X31 = con-jst-zh
X5-X12 X15 X22-X25 = con-jst-xh
X16 = SparkFun-Connectors
X27 = con-jst2

## Nets
+3V3: C3.1 C4.1 C5.1 C8.1 C9.1 C10.1 C11.1 C12.1 C13.1 C14.1 C15.1 C16.1 C17.1 C25.1 C30.1 C31.2 C39.2 D5.C HP_1:R2.2 HP_1:R5.2 HP_2:R2.2 HP_2:R5.2 MD_1:R1.2 MD_1:U1.16 MD_2:R1.2 MD_2:U1.16 MD_3:R1.2 MD_3:U1.16 MD_4:R1.2 MD_4:U1.16 MD_5:R1.2 MD_5:U1.16 MD_6:R1.2 MD_6:U1.16 R1.2 R3.2 R5.1 R6.1 R10.2 R11.2 R19.1 R20.2 R21.2 R22.2 R27.1 R39.2 SJ1.3 SJ2.3 SJ3.3 SJ4.3 SP1.P$3 TP22.P$1 U1.2 U1.6 U1.8 U2.8 U3.11 U3.19 U3.21 U3.22 U3.28 U3.50 U3.75 U3.100 U4.2 U4.4 U6.16 X9.4 X10.4 X17.1 X18.1 X19.1 X20.1 X21.1 X23.1 X24.1 X25.1 X26.6 X27.1 X28.1
+5V: C23.1 C24.1 C40.1 D3.A L1.2 R16.2 R17.2 R34.2 SJ1.1 SJ2.1 SJ3.1 SJ4.1 U4.3 U7.8 X11.1 X12.1 X13.1 X26.7 X31.1
+24V: C26.1 C27.1 C29.2 C32.1 D1.C D2.C HP_1:C5.2 HP_1:C6.1 HP_1:C8.+ HP_1:Q7.P$2 HP_1:Q7.P$3 HP_1:Q7.P$4 HP_1:Q7.P$234A HP_1:Q7.P$234B HP_1:Q8.P$2 HP_1:Q8.P$3 HP_1:Q8.P$4 HP_1:Q8.P$234A HP_1:Q8.P$234B HP_1:U1.1 HP_2:C5.2 HP_2:C6.1 HP_2:C8.+ HP_2:Q7.P$2 HP_2:Q7.P$3 HP_2:Q7.P$4 HP_2:Q7.P$234A HP_2:Q7.P$234B HP_2:Q8.P$2 HP_2:Q8.P$3 HP_2:Q8.P$4 HP_2:Q8.P$234A HP_2:Q8.P$234B HP_2:U1.1 MD_1:C3.1 MD_1:C4.1 MD_1:C5.+ MD_1:U1.11 MD_2:C3.1 MD_2:C4.1 MD_2:C5.+ MD_2:U1.11 MD_3:C3.1 MD_3:C4.1 MD_3:C5.+ MD_3:U1.11 MD_4:C3.1 MD_4:C4.1 MD_4:C5.+ MD_4:U1.11 MD_5:C3.1 MD_5:C4.1 MD_5:C5.+ MD_5:U1.11 MD_6:C3.1 MD_6:C4.1 MD_6:C5.+ MD_6:U1.11 R13.1 R14.2 R15.2 R30.2 U5.8 U7.3 U7.4 X3.1 X4.1
A: R9.2 TP3.P$1 U2.6 X15.2
AGND: C41.- C42.- HP_1:C1.2 HP_1:C2.2 HP_1:C3.2 HP_1:C6.2 HP_1:C8.- HP_1:R1.1 HP_1:R3.1 HP_1:R6.1 HP_1:U1.5 HP_1:U1.16 HP_1:U1.20 HP_1:U1.EXP HP_2:C1.2 HP_2:C2.2 HP_2:C3.2 HP_2:C6.2 HP_2:C8.- HP_2:R1.1 HP_2:R3.1 HP_2:R6.1 HP_2:U1.5 HP_2:U1.16 HP_2:U1.20 HP_2:U1.EXP J1.2 J1.P$1 J1.P$2 J1.P$3 J1.P$4 J1.P$5 J1.P$6 L3.2 MD_1:C4.2 MD_1:C5.- MD_1:U1.9 MD_1:U1.17 MD_1:U1.18 MD_1:U1.19 MD_1:U1.20 MD_1:U1.21 MD_1:U1.22 MD_1:U1.23 MD_1:U1.24 MD_1:U1.25 MD_1:U1.26 MD_1:U1.27 MD_1:U1.28 MD_1:U1.29 MD_1:U1.30 MD_1:U1.31 MD_1:U1.32 MD_2:C4.2 MD_2:C5.- MD_2:U1.9 MD_2:U1.17 MD_2:U1.18 MD_2:U1.19 MD_2:U1.20 MD_2:U1.21 MD_2:U1.22 MD_2:U1.23 MD_2:U1.24 MD_2:U1.25 MD_2:U1.26 MD_2:U1.27 MD_2:U1.28 MD_2:U1.29 MD_2:U1.30 MD_2:U1.31 MD_2:U1.32 MD_3:C4.2 MD_3:C5.- MD_3:U1.9 MD_3:U1.17 MD_3:U1.18 MD_3:U1.19 MD_3:U1.20 MD_3:U1.21 MD_3:U1.22 MD_3:U1.23 MD_3:U1.24 MD_3:U1.25 MD_3:U1.26 MD_3:U1.27 MD_3:U1.28 MD_3:U1.29 MD_3:U1.30 MD_3:U1.31 MD_3:U1.32 MD_4:C4.2 MD_4:C5.- MD_4:U1.9 MD_4:U1.17 MD_4:U1.18 MD_4:U1.19 MD_4:U1.20 MD_4:U1.21 MD_4:U1.22 MD_4:U1.23 MD_4:U1.24 MD_4:U1.25 MD_4:U1.26 MD_4:U1.27 MD_4:U1.28 MD_4:U1.29 MD_4:U1.30 MD_4:U1.31 MD_4:U1.32 MD_5:C4.2 MD_5:C5.- MD_5:U1.9 MD_5:U1.17 MD_5:U1.18 MD_5:U1.19 MD_5:U1.20 MD_5:U1.21 MD_5:U1.22 MD_5:U1.23 MD_5:U1.24 MD_5:U1.25 MD_5:U1.26 MD_5:U1.27 MD_5:U1.28 MD_5:U1.29 MD_5:U1.30 MD_5:U1.31 MD_5:U1.32 MD_6:C4.2 MD_6:C5.- MD_6:U1.9 MD_6:U1.17 MD_6:U1.18 MD_6:U1.19 MD_6:U1.20 MD_6:U1.21 MD_6:U1.22 MD_6:U1.23 MD_6:U1.24 MD_6:U1.25 MD_6:U1.26 MD_6:U1.27 MD_6:U1.28 MD_6:U1.29 MD_6:U1.30 MD_6:U1.31 MD_6:U1.32 Q1.S1 Q1.S2 Q1.S3 Q2.S1 Q2.S2 Q2.S3
AMUX_OUT: U3.24 U6.3
AMUX_S0: U3.2 U6.11
AMUX_S1: U3.3 U6.10
AMUX_S2: U3.4 U6.9
B: TP4.P$1 U2.7 X15.1 X16.2
BAT_IN: C41.+ C42.+ J1.1 U7.1 U7.2
BAT_MEAS: R30.1 R31.2 U6.12
BUMPER1: C1.1 R4.2 TP10.P$1 U3.82
BUMPER2: C2.1 R2.2 TP11.P$1 U3.81
BUZZER: Q4.G R29.1 TP23.P$1 U3.77
CENTRAL_BRUSH_A: MD_4:TP3.P$1 MD_4:U1.1 U3.64
CENTRAL_BRUSH_B: MD_4:TP4.P$1 MD_4:U1.2 U3.78
CENTRAL_BRUSH_CURRENT: MD_4:R2.1 MD_4:TP7.P$1 MD_4:U1.6 U3.34
CENTRAL_BRUSH_FAULT: MD_4:R1.1 MD_4:TP6.P$1 MD_4:U1.4 U3.58
CLEAN/STAIN: U3.83 X27.2
CLIFF1_OUT: TP28.P$1 U3.17 X24.2
CLIFF2_OUT: TP32.P$1 U3.18 X23.2
CLIFF_CTL: TP29.P$1 U3.30 X23.3 X24.3
CS: U3.88 X18.5
D_N: J2.6 R37.1 TP2.P$1 U3.70
D_P: J2.7 R38.1 TP1.P$1 U3.71
DRIVE1_A: MD_1:TP3.P$1 MD_1:U1.1 U3.66
DRIVE1_B: MD_1:TP4.P$1 MD_1:U1.2 U3.80
DRIVE1_CURRENT: MD_1:R2.1 MD_1:TP7.P$1 MD_1:U1.6 U3.35
DRIVE1_FAULT: MD_1:R1.1 MD_1:TP6.P$1 MD_1:U1.4 U3.60
DRIVE1_OUT_A: MD_1:C6.1 MD_1:TP2.P$1 MD_1:U1.8 X9.1
DRIVE1_OUT_B: MD_1:R3.2 MD_1:TP1.P$1 MD_1:U1.10 X9.2
DRIVE2_A: MD_2:TP3.P$1 MD_2:U1.1 U3.65
DRIVE2_B: MD_2:TP4.P$1 MD_2:U1.2 U3.79
DRIVE2_CURRENT: MD_2:R2.1 MD_2:TP7.P$1 MD_2:U1.6 U3.36
DRIVE2_FAULT: MD_2:R1.1 MD_2:TP6.P$1 MD_2:U1.4 U3.59
DRIVE2_OUT_A: MD_2:C6.1 MD_2:TP2.P$1 MD_2:U1.8 X10.1
DRIVE2_OUT_B: MD_2:R3.2 MD_2:TP1.P$1 MD_2:U1.10 X10.2
ENCODER1: C44.1 R5.2 TP12.P$1 U3.55 X9.5
ENCODER2: C45.1 R6.2 TP15.P$1 U3.56 X10.5
EXT_TEMP1: R21.1 TP24.P$1 U3.8 X19.2
EXT_TEMP2: R22.1 TP25.P$1 U3.9 X28.2
GAP_CTL: TP31.P$1 U3.29 X25.2
GAP_SENSE_1: TP34.P$1 U3.15 X25.4
GAP_SENSE_2: TP33.P$1 U3.16 X25.3
GND: C1.2 C2.2 C3.2 C4.2 C5.2 C6.1 C7.1 C8.2 C9.2 C10.2 C11.2 C12.2 C13.2 C14.2 C15.2 C16.2 C17.2 C18.2 C19.2 C20.2 C21.1 C22.1 C23.2 C24.2 C25.2 C26.2 C28.1 C30.2 C31.1 C32.2 C33.2 C34.2 C35.2 C36.2 C37.2 C38.2 C39.1 C40.2 C43.2 C44.2 C45.2 D4.1 J2.4 J2.8 J2.P1 J2.P2 J2.P3 J2.P4 L3.1 MD_1:C2.2 MD_1:R2.2 MD_1:U1.7 MD_1:U1.15 MD_2:C2.2 MD_2:R2.2 MD_2:U1.7 MD_2:U1.15 MD_3:C2.2 MD_3:R2.2 MD_3:U1.7 MD_3:U1.15 MD_4:C2.2 MD_4:R2.2 MD_4:U1.7 MD_4:U1.15 MD_5:C2.2 MD_5:R2.2 MD_5:U1.7 MD_5:U1.15 MD_6:C2.2 MD_6:R2.2 MD_6:U1.7 MD_6:U1.15 Q4.S R7.2 R8.2 R12.1 R18.1 R24.1 R26.1 R28.2 R29.2 R31.1 R33.1 R36.1 S1.3 S1.4 SJ5.2 U1.1 U1.5 U1.7 U2.5 U3.10 U3.20 U3.27 U3.74 U3.99 U4.1 U5.4 U5.9 U6.7 U6.8 U7.5 X1.2 X2.2 X9.3 X10.3 X11.2 X12.2 X13.4 X14.2 X17.4 X18.6 X19.3 X20.5 X21.5 X22.6 X23.4 X24.4 X25.5 X26.1 X27.7 X27.8 X28.3 X29.2 X30.2 X31.4 XTAL1.2 XTAL1.4
HP_1:!OC: HP_1:TP2.P$1 HP_1:U1.10
HP_1:ACT4_DRIVE+: HP_1:Q8.P$9 HP_1:R7.2 HP_1:TP8.P$1 HP_1:U1.18 HP_1:X1.1
HP_1:ACT4_DRIVE-: HP_1:C7.1 HP_1:Q7.P$9 HP_1:TP9.P$1 HP_1:U1.23 HP_1:X1.2
HP_1:AVDD: HP_1:C2.1 HP_1:U1.7
HP_1:N$4: HP_1:Q8.P$8 HP_1:U1.19
HP_1:N$40: HP_1:C4.1 HP_1:U1.3
HP_1:N$41: HP_1:C4.2 HP_1:U1.4
HP_1:N$44: HP_1:Q7.P$5 HP_1:Q7.P$6 HP_1:Q7.P$7 HP_1:Q8.P$5 HP_1:Q8.P$6 HP_1:Q8.P$7 HP_1:R6.2 HP_1:U1.21
HP_1:N$45: HP_1:R3.2 HP_1:R5.1 HP_1:TP7.P$1 HP_1:U1.12
HP_1:N$46: HP_1:Q7.P$8 HP_1:U1.22
HP_1:N$49: HP_1:C5.1 HP_1:U1.2
HP_1:N$50: HP_1:C3.1 HP_1:U1.8
HP_1:N$52: HP_1:Q8.P$1 HP_1:U1.17
HP_1:N$53: HP_1:Q7.P$1 HP_1:U1.24
HP_1:N$77: HP_1:C7.2 HP_1:R7.1
HP_1:VREF: HP_1:C1.1 HP_1:R1.2 HP_1:R2.1 HP_1:TP5.P$1 HP_1:U1.6
HP_2:!OC: HP_2:TP2.P$1 HP_2:U1.10
HP_2:ACT4_DRIVE+: HP_2:Q8.P$9 HP_2:R7.2 HP_2:TP8.P$1 HP_2:U1.18 HP_2:X1.1
HP_2:ACT4_DRIVE-: HP_2:C7.1 HP_2:Q7.P$9 HP_2:TP9.P$1 HP_2:U1.23 HP_2:X1.2
HP_2:AVDD: HP_2:C2.1 HP_2:U1.7
HP_2:N$4: HP_2:Q8.P$8 HP_2:U1.19
HP_2:N$40: HP_2:C4.1 HP_2:U1.3
HP_2:N$41: HP_2:C4.2 HP_2:U1.4
HP_2:N$44: HP_2:Q7.P$5 HP_2:Q7.P$6 HP_2:Q7.P$7 HP_2:Q8.P$5 HP_2:Q8.P$6 HP_2:Q8.P$7 HP_2:R6.2 HP_2:U1.21
HP_2:N$45: HP_2:R3.2 HP_2:R5.1 HP_2:TP7.P$1 HP_2:U1.12
HP_2:N$46: HP_2:Q7.P$8 HP_2:U1.22
HP_2:N$49: HP_2:C5.1 HP_2:U1.2
HP_2:N$50: HP_2:C3.1 HP_2:U1.8
HP_2:N$52: HP_2:Q8.P$1 HP_2:U1.17
HP_2:N$53: HP_2:Q7.P$1 HP_2:U1.24
HP_2:N$77: HP_2:C7.2 HP_2:R7.1
HP_2:VREF: HP_2:C1.1 HP_2:R1.2 HP_2:R2.1 HP_2:TP5.P$1 HP_2:U1.6
L-CURRENT: R35.1 R36.2 U3.25
M_VREF: MD_1:C2.1 MD_1:U1.5 MD_2:C2.1 MD_2:U1.5 MD_3:C2.1 MD_3:U1.5 MD_4:C2.1 MD_4:U1.5 MD_5:C2.1 MD_5:U1.5 MD_6:C2.1 MD_6:U1.5 R27.2 R28.1 TP14.P$1
MD_1:N$1: MD_1:C1.2 MD_1:U1.14
MD_1:N$2: MD_1:C1.1 MD_1:U1.13
MD_1:N$3: MD_1:C3.2 MD_1:U1.12
MD_1:N$4: MD_1:C6.2 MD_1:R3.1
MD_2:N$1: MD_2:C1.2 MD_2:U1.14
MD_2:N$2: MD_2:C1.1 MD_2:U1.13
MD_2:N$3: MD_2:C3.2 MD_2:U1.12
MD_2:N$4: MD_2:C6.2 MD_2:R3.1
MD_3:N$1: MD_3:C1.2 MD_3:U1.14
MD_3:N$2: MD_3:C1.1 MD_3:U1.13
MD_3:N$3: MD_3:C3.2 MD_3:U1.12
MD_3:N$4: MD_3:C6.2 MD_3:R3.1
MD_4:N$1: MD_4:C1.2 MD_4:U1.14
MD_4:N$2: MD_4:C1.1 MD_4:U1.13
MD_4:N$3: MD_4:C3.2 MD_4:U1.12
MD_4:N$4: MD_4:C6.2 MD_4:R3.1
MD_5:N$1: MD_5:C1.2 MD_5:U1.14
MD_5:N$2: MD_5:C1.1 MD_5:U1.13
MD_5:N$3: MD_5:C3.2 MD_5:U1.12
MD_5:N$4: MD_5:C6.2 MD_5:R3.1
MD_6:N$1: MD_6:C1.2 MD_6:U1.14
MD_6:N$2: MD_6:C1.1 MD_6:U1.13
MD_6:N$3: MD_6:C3.2 MD_6:U1.12
MD_6:N$4: MD_6:C6.2 MD_6:R3.1
MISO: TP8.P$1 U3.90 X18.3
MOSI: TP9.P$1 U3.91 X18.2
MOTOR_SLEEP: HP_1:U1.13 HP_2:U1.13 MD_1:U1.3 MD_2:U1.3 MD_3:U1.3 MD_4:U1.3 MD_5:U1.3 MD_6:U1.3 R20.1 TP13.P$1 U3.37
N$1: R2.1 R3.1 X2.1
N$2: MD_3:C6.1 MD_3:TP2.P$1 MD_3:U1.8 X5.1
N$3: R1.1 R4.1 X1.1
N$4: MD_3:R3.2 MD_3:TP1.P$1 MD_3:U1.10 X5.2
N$5: MD_5:C6.1 MD_5:TP2.P$1 MD_5:U1.8 X7.1
N$6: MD_5:R3.2 MD_5:TP1.P$1 MD_5:U1.10 X7.2
N$7: MD_6:C6.1 MD_6:TP2.P$1 MD_6:U1.8 X8.1
N$8: MD_6:R3.2 MD_6:TP1.P$1 MD_6:U1.10 X8.2
N$9: MD_4:C6.1 MD_4:TP2.P$1 MD_4:U1.8 X6.1
N$10: MD_4:R3.2 MD_4:TP1.P$1 MD_4:U1.10 X6.2
N$11: D2.A Q2.D1 Q2.D2 Q2.D3 Q2.D4 Q2.DRAIN0 X4.2
N$12: D1.A Q1.D1 Q1.D2 Q1.D3 Q1.D4 Q1.DRAIN0 X3.2
N$13: R9.1 X16.1
N$14: C18.1 U3.73
N$15: C19.1 U3.49
N$16: R12.2 TP21.P$1 U3.94
N$17: SJ1.2 X22.1
N$18: D3.K F1.1
N$19: D5.A Q4.D SP1.P$2
N$20: R23.2 X14.1
N$21: C33.1 C34.1 SJ2.2 X14.3
N$22: R25.2 X29.1
N$23: C28.2 R16.1
N$24: C35.1 C36.1 SJ3.2 X29.3
N$25: R32.2 X30.1
N$26: C37.1 C38.1 SJ4.2 X30.3
N$27: R13.2 U5.2
N$28: C43.1 R35.2 U7.7
N$29: J2.2 R37.2
N$30: J2.3 R38.2
N$31: R34.1 SJ5.1 U7.6
N$32: R42.2 X13.2
N$33: R39.1 U6.6
N$34: R43.2 X13.3
N$37: R40.2 X31.2
N$38: R41.2 X31.3
N$39: Q3.1 Q3.2 Q3.3 R15.1 U5.5
N$41: C29.1 R14.1 U5.1
N$43: R17.1 R18.2 U5.3
N$46: C27.2 U5.7
N$50: D4.2 L1.1 Q3.5 Q3.6 Q3.7 Q3.8 Q3.9
N$51: Q3.4 U5.6
ON/OFF: U3.85 X27.4
PRESSURE1: R32.1 R33.2 TP30.P$1 U3.23
PRESSURE2: R23.1 R24.2 TP27.P$1 U3.31
PRESSURE3: R25.1 R26.2 TP26.P$1 U3.32
PRESSURE_PUMP_A: MD_3:TP3.P$1 MD_3:U1.1 U3.63
PRESSURE_PUMP_B: MD_3:TP4.P$1 MD_3:U1.2 U3.67
PRESSURE_PUMP_CURRENT: MD_3:R2.1 MD_3:TP7.P$1 MD_3:U1.6 U6.15
PRESSURE_PUMP_FAULT: MD_3:R1.1 MD_3:TP6.P$1 MD_3:U1.4 U3.57
RESET: C20.1 S1.1 S1.2 TP20.P$1 U3.14 X20.4 X21.4
RS485_DIR: R19.2 U2.2 U2.3 U3.97
RS485_RX: U2.1 U3.87
RS485_TX: U2.4 U3.86
SCK: TP7.P$1 U3.89 X18.4
SCL: R11.1 TP6.P$1 U1.4 U3.92 X17.2 X27.5
SCRUBBER1_A: MD_5:TP3.P$1 MD_5:U1.1 U3.45
SCRUBBER1_B: MD_5:TP4.P$1 MD_5:U1.2 U3.46
SCRUBBER1_CURRENT: MD_5:R2.1 MD_5:TP7.P$1 MD_5:U1.6 U3.26
SCRUBBER1_FAULT: MD_5:R1.1 MD_5:TP6.P$1 MD_5:U1.4 U3.54
SCRUBBER2_A: MD_6:TP3.P$1 MD_6:U1.1 U3.44
SCRUBBER2_B: MD_6:TP4.P$1 MD_6:U1.2 U3.43
SCRUBBER2_CURRENT: MD_6:R2.1 MD_6:TP7.P$1 MD_6:U1.6 U3.33
SCRUBBER2_FAULT: MD_6:R1.1 MD_6:TP6.P$1 MD_6:U1.4 U3.53
SDA: R10.1 TP5.P$1 U1.3 U3.93 X17.3 X27.6
SERVO1: TP16.P$1 U3.62 X11.3
SERVO2: TP17.P$1 U3.61 X12.3
SMBUS_ALERT: U3.51 X22.4
SMBUS_IO: U3.52 X22.5
SMBUS_SCL: U3.47 X22.3
SMBUS_SDA: U3.48 X22.2
SOLENOID1: Q1.GATE R7.1 TP18.P$1 U3.95
SOLENOID2: Q2.GATE R8.1 TP19.P$1 U3.96
SPARE_ANALOG1: U6.5 X26.2
SPARE_ANALOG2: U6.4 X26.3
SPARE_GPIO1: U3.98 X26.4
SPARE_GPIO2: U3.1 X26.5
STAINING_FAN1_A: HP_1:TP4.P$1 HP_1:U1.15 R40.1 U3.40
STAINING_FAN1_B: HP_1:TP1.P$1 HP_1:U1.14 U3.39
STAINING_FAN1_CURRENT: HP_1:TP6.P$1 HP_1:U1.11 U6.14
STAINING_FAN1_FAULT: HP_1:TP3.P$1 HP_1:U1.9 R41.1 U3.5
STAINING_FAN2_A: HP_2:TP4.P$1 HP_2:U1.15 R42.1 U3.42
STAINING_FAN2_B: HP_2:TP1.P$1 HP_2:U1.14 U3.41
STAINING_FAN2_CURRENT: HP_2:TP6.P$1 HP_2:U1.11 U6.13
STAINING_FAN2_FAULT: HP_2:TP3.P$1 HP_2:U1.9 R43.1 U3.38
START/STOP: U3.84 X27.3
SWCLK: TP36.P$1 U3.76 X20.2
SWDIO: TP35.P$1 U3.72 X20.3
USART1_RX: TP38.P$1 U3.69 X21.3
USART1_TX: TP37.P$1 U3.68 X21.2
VBAT: U3.6
VUSB: C6.2 C7.2 F1.2 J2.1 J2.5
X_N: C22.2 U3.13 XTAL1.3
X_P: C21.2 U3.12 XTAL1.1

## Tracks (layer width: path | path; a pad name or v marks a point on that pad's centre or on a via)
+3V3  (via drill 0.3, 0.3 pad 0.55, 0.35, 0.35 pad 0.55)
  Top 0.2: 93.72,75.33 U1.2 v93.72,73.71 | 93.72,75.33 94.03,75.63 94.38,75.98 U1.8 94.59,76.36 C4.1 95.85,77.26 v95.9,77.31 | U1.6 93.08,75.91 93.14,75.85 | 93.14,75.85 93.65,75.33 93.72,75.33 | U3.28 63.55,59.51 63.38,59.33 63.38,59.13 | 63.38,59.13 C12.1 | C17.1 68.1,65.16 C16.1 69.1,64.71 70,63.81 U3.19 | 68.5,63.39 69,62.89 U3.21 | U3.22 68.5,62.79 68.5,62.72 68.5,63.09 68.5,63.39 | U3.11 74,63.19 74.8,63.99 C11.1 74.95,64.56 v75.8,65.41 | R21.2 81.3,66.31 X19.1 | R22.2 81.3,70.61 X28.1 | U3.100 81.18,60.51 82.68,62.01 C10.1 83.25,62.11 C14.1 82.75,62.71 v82.2,62.71 | v101.6,70.71 101.6,69.26 C5.1 101.85,67.95 U2.8 101.21,67.31 v99,67.31 97.3,69.01 R19.1 | U3.50 65.4,48.43 C9.1 65.45,45.41 v66.8,45.41 66.7,45.31 R20.2 | R11.2 R10.2 85.9,57.61 v86,57.71 | MD_6:U1.16 70.45,13.78 v70.45,14.66 | v77.26,24.61 77.26,23.88 77.58,23.56 80.21,23.56 80.58,23.93 MD_4:U1.16 | MD_3:U1.16 88,14.88 v88,14.91 | v102.9,14.71 102.9,13.78 MD_2:U1.16 | MD_1:U1.16 96.8,23.43 94,23.43 93.7,23.73 93.7,24.16 v93.3,24.56 | MD_3:R1.2 76.6,12.01 76.43,12.18 v76.43,12.21 | v90.5,24.51 90.5,25.01 90.3,25.21 MD_4:R1.2 | MD_6:R1.2 v60.7,13.41 | MD_5:R1.2 73.9,24.31 74.5,24.91 v74.5,24.71 | v59.7,24.71 59.7,24.5 61.1,23.1 62.85,23.1 62.98,23.23 MD_5:U1.16 | MD_1:R1.2 v108,25.01 | R6.1 73.55,40.51 v74.15,39.91 | MD_2:R1.2 94.44,13.27 v94.44,14.81 | v81.1,45.71 81.1,44.76 C15.1 C8.1 79.4,44.76 79.4,45.21 79,45.61 U3.75 | v61.03,56.71 61.83,56.71 63.03,57.91 C13.1 63.05,58.81 C12.1 | R1.2 v102.3,56.51 | R3.2 v102.1,50.91 | C17.1 67.9,65.31 68.25,64.96 68.5,64.71 68.5,63.39 | R27.1 84.5,43.41 85.15,42.76 v85.15,42.66 | v50,65.21 50,65.4 SJ3.3
  Top 0.2: v57.2,65.11 56.09,65.11 SJ2.3 | C31.2 96.58,52.81 X27.1 97.58,52.71 98.17,53.31 v98.47,53.31 | 63.38,59.13 C12.1 | SJ4.3 62.8,65.4 63,65.6 63,65.2 63.81,66 v63.85,66 | C17.1 67.14,66.12 v66.69,66.12 | 93.14,75.85 91.36,75.85 90.9,76.31 C3.1 v90.85,77.16 | C39.2 50.65,60.91 U6.16 49.19,60.85 48.5,60.16 v48.5,60.01 | R39.2 v43.7,52.01 | R5.1 70.2,41.28 69.42,42.06 v69.15,42.06 | HP_1:R5.2 v21.9,30.41 | HP_1:R2.2 v26.9,30.51 | HP_2:R5.2 38.16,30.95 v37.25,30.95 | HP_2:R2.2 45.8,30.31 v45.9,30.41
  Top 0.254: SJ1.3 v9,77.11
  Top 0.305: SP1.P$3 90.8,41.31 v90.7,41.41
  Top 0.406: D5.C v93.9,50.91
  L2_GND 0.2: 97.74,14.41 97.74,14.61 97.74,15.11 97.74,15.41 105.65,23.32 106.21,23.32 107.9,25.01 v108,25.01 | v102.9,14.71 102.6,14.41 97.74,14.41 | X10.4 96.87,14.41 97.74,14.41 | v74.5,24.71 74.96,24.25 74.96,19.16 v70.45,14.66 | v90.5,24.51 90.5,17.41 v88,14.91 | v93.3,24.56 93.11,24.37 93.11,16.14 v94.44,14.81
  L3_VCC 0.2: v60.7,13.41 62.45,15.16 69.95,15.16 v70.45,14.66 71.7,13.41 74.93,13.41 76.13,12.21 v76.43,12.21
  Bottom 0.2: v31.8,46.91 31,47.71 TP22.P$1
  other vias: 31.8,49.01 31.8,47.91 32.9,49.01 31.8,53.01 33,53.01 34.2,53.01 33,54.31 31.8,54.31 34.2,54.31 33,55.41
  pour L3_VCC (rank 3): 0,80.21 0,37.61 18,37.61 18,24.5 110,24.21 110,80.21
  pour Top (no thermals): 32.6,58.41 33.9,58.41 34.3,58.01 34.3,55.51 35.1,54.71 35.1,45.71 34.9,45.51 30.4,45.51 30.4,53.41 32.6,55.61
+5V  (via drill 0.3)
  Top 0.2: v56,68.01 56,67.02 SJ2.1 | v62.5,68.01 62.7,67.81 SJ4.1 | v49,68.01 49,67.22 SJ3.1 | R34.2 14.5,9.86 C40.1 14.15,9.81 U7.8
  Top 0.305: U7.8 11.46,9.15 10.88,9.15 10.74,9.01 v10.2,9.01
  Top 0.406: SJ1.1 11.51,78.5 v11.5,78.51 | X26.7 38.8,57.11 38.8,47.71 X31.1 X13.1
  L3_VCC 0.406: X11.1 35.28,76.43 35.28,76.29
  L3_VCC 0.61: v11.5,78.51 33.06,78.51 35.28,76.29 | X11.1 35.56,76.51 X12.1 | X12.1 35.56,67.07 31.2,62.71 v30.7,62.71 v29.8,62.71 v28.7,62.71 | X12.1 37.06,66.71 40.7,66.71 | 40.7,66.71 47.7,66.71 v49,68.01 v56,68.01 v62.5,68.01 | X26.7 40.9,66.51 40.7,66.71
  Bottom 0.305: v26.3,47.61 26.3,41.31 23.34,38.35 8.84,38.35 2.5,32.01 2.5,20.41 10.2,12.71 v10.2,9.01
  pour Top (no thermals): 23.7,56.91 23.7,47.01 30,47.01 30,53.51 32.2,55.71 32.2,66.41 28.1,66.41 28.1,61.31
+24V  (via drill 0.3, 0.3 pad 0.55, 0.35)
  Top 0.2: C27.1 9.4,57.01 R30.2 | HP_1:Q8.P$2 20.99,12.71
  Top 0.406: C29.2 R14.2 R13.1 3.95,44.31 v2.6,44.31
  other vias: 48.5,23.61 48.5,22.61 47.8,22.11 46.9,22.11 47.7,23.01 32,11.51 34,11.51 33,12.51 33,10.51 32,9.51 34,9.51 33,8.01 32,7.01 34,7.01 33,6.01 32,5.01 34,5.01 33,4.01 32,3.01 34,3.01 33,2.01 32,1.01 34,1.01 13.5,4.01 13.5,2.01 12.5,1.01 12.5,3.01 11.5,4.01 11.5,2.01 10.5,3.01 10.5,1.01 15.5,4.01 16.5,3.01 14.5,3.01 15.5,2.01 16.5,1.01 14.5,1.01 29.9,23.81 29.3,23.01 28.8,22.21 29.7,22.21 30.1,23.01 5,7.01 5,5.01 4,6.51 5.5,1.51 3.5,49.51 1,49.51 1,52.51 3.5,52.51 3.5,55.51 1,55.51 6,55.51 6,52.51 9.5,4.01 9.5,2.01 8.5,3.01 8.5,1.01 7.5,2.01 7.5,4.01 6.5,3.01 6.5,1.01
  pour Top (no thermals): 59.5,27.71 59.5,26.21 64.8,26.21 64.8,26.61 62.3,26.61 62.1,26.81 62.1,27.71
  pour Top (rank 2, no thermals): 60.9,27.81 60.8,27.91 58,27.91 58,17.81 58.3,17.51 62.8,17.51 62.9,17.61 62.9,20.21 60.9,22.21
  pour Top (rank 2, no thermals): 69.4,10.71 69.4,10.41 71.2,10.41 72.1,9.51 74,9.51 75,10.51 75,19.71 70.7,19.71 70.6,19.61 70.6,16.61 72.9,14.31 72.9,10.71
  pour Top (rank 2, no thermals): 78.9,16.91 78.9,26.61 79.3,27.01 81.7,27.01 81.7,27.31 75,27.31 75,17.51 75.6,16.91
  pour Top (rank 2, no thermals): 86.2,10.71 89.4,10.71 89.5,10.81 89.5,15.41 87.1,17.81 87.1,20.91 91.8,20.91 91.9,20.81 91.9,11.51 90.8,10.41 86.2,10.41
  pour Top (rank 2, no thermals): 102,10.41 107.5,10.41 108.1,11.01 108.1,20.01 103.6,20.01 103.6,16.91 105.7,14.81 105.7,12.11 104.4,10.81 102,10.81
  pour Top (rank 2, no thermals): 97.9,27.11 97.9,26.71 95.5,26.71 95.3,26.51 95.3,16.31 92.2,16.31 91.9,16.61 91.9,27.11
  pour L3_VCC (no thermals): 0,37.71 0,0.11 109.8,0.11 109.8,23.91 17.8,24.1 17.8,37.71
  pour Top (rank 2, no thermals): 0,13.71 48.9,13.71 48.9,0.11 0,0.11
  pour Top (rank 2, no thermals): 43.9,24.21 45.8,24.21 46.1,23.91 50.8,23.91 50.8,21.21 47.2,21.21 45.9,22.51 44.4,22.51 43.9,23.01
  pour Top (no thermals): 25.3,24.31 26.5,24.31 26.8,24.01 32.4,24.01 32.4,21.61 28.3,21.61 28.3,22.21 28.2,22.31 25.9,22.31 25.9,23.91 25.8,24.01 25.3,24.01
  pour Top (rank 2, no thermals): 49,6.41 49,0.11 51.9,0.11 51.9,5.71 51.3,6.31 51.2,6.41
  pour Top (rank 2, no thermals): 54.8,6.21 56.4,6.21 57.2,5.41 57.2,0.01 54.6,0.01 54.6,6.01
  pour Top (no thermals): 11,49.01 11,50.01 9.1,51.91 9.1,56.61 0.4,56.61 0.4,48.01 0.6,47.81 9.3,47.81 10,48.51 10.5,48.51
  pour L3_VCC: 0,57.51 9,57.51 9,56.51 17.8,47.71 17.8,37.31 0,37.31
A
  Top 0.2: U2.6 102.94,64.87 R9.2 106.13,64.61 X15.2
  Bottom 0.2: X15.2 103.87,64.24 TP3.P$1
AGND  (via drill 0.3 pad 0.55, 0.35 pad 0.55)
  Top 0.2: HP_2:R6.1 38.5,20.01 38.6,20.11 38.6,21.11 39.59,22.1 40.8,22.1 41.55,22.86 HP_2:U1.20 | HP_2:U1.5 45.15,26.16 v45.2,26.21 | HP_2:U1.16 39.5,25.16 39.1,24.76 v38.7,24.76 | HP_2:C6.2 v46,21.76 | HP_1:U1.20 22.93,23.49 22.93,22.98 22.05,22.1 21.54,22.1 19.7,20.26 19.7,19.91 HP_1:R6.1 | v27.6,21.7 27.54,21.76 HP_1:C6.2 | HP_1:U1.16 21.05,25.16 v20.5,24.61 | v26.65,26.79 26.05,26.18 25.62,26.18 HP_1:U1.5 | MD_3:C4.2 v90.2,9.46
  other vias: 41.8,25.91 42.8,25.91 42.8,25.01 41.8,25.01 23.2,25.81 24.1,25.81 24.1,24.91 23.2,24.91 18.5,25.01 48.5,1.01 48,2.01 48.5,3.01 48,4.01 48,6.01 48.5,5.01 48.5,7.01 48,8.01 48.5,9.51 47.9,11.11 54.5,10.01 54.5,11.51 54.5,13.01 57.5,11.51 57.5,13.01 57.5,14.51 57.5,16.01 57.5,17.51 57.5,19.01 57.5,20.51 57.5,22.01 57.5,23.51 57.5,25.01 57.5,26.51 57.5,28.01 57.5,29.51 57.5,31.01 54.5,34.51 54.5,33.01 53,33.01 53,34.51 53,31.51 51,30.01 49.5,30.01 49.5,31.51 50,33.01 15.5,25.01 17,26.01 15.5,27.01 18.5,27.01 18.5,29.01 15.5,29.01 17,24.01 15.5,31.01 18.5,31.01 15.5,33.01 17,34.01 20,34.01 18.5,33.01 18.5,35.01 14,36.01 12.5,37.01 15.5,23.01 18.5,23.01 20,36.01 18.5,37.01 21.5,37.01 24.5,37.01 27.5,37.01 30.5,37.01 33.5,37.01 36.5,37.01 39.5,37.01 43,36.61 45.3,36.01 29,36.01 23,36.01 32,36.01 35,36.01 38,36.01 41,36.01 46.8,36.81 66.1,8.31 67.25,8.31 68.35,8.31 73.5,8.71 82.9,8.21 84,8.21 85.2,8.31 86.6,8.41 89,8.41 61,1.01 61,2.51 61,4.01 61,5.51 61,7.01 61,8.51 72.5,1.01 72.5,2.51 72.5,4.01 72.5,5.51 72.5,7.01 74,7.01 74,5.51 74,4.01 74,2.51 74,1.01 75.5,1.01 75.5,2.51 75.5,4.01 75.5,5.51 75.5,7.01 77,7.01 75.5,8.51 77,8.51 75.5,10.01 83,15.51 84,15.51 85,15.51 85,16.51 84,16.51 83,16.51 86,15.51 86,16.51 98.5,15.11 99.5,15.11 100.5,15.11 101.5,15.11 101.5,16.01 100.5,16.01 99.5,16.01 102.5,16.01 98.5,8.36 99.8,8.36 101,8.36 102.2,8.41 106.5,9.51 106.5,8.01 105,8.01 104,7.01 103,6.01 105.5,7.01 104.5,6.01 96.5,21.01 97.5,21.01 98.5,21.01 99.5,21.01 100.5,21.01 99.5,20.01 98.5,20.01 97.5,20.01 96.5,20.01 83.5,23.01 82.5,23.01 81.5,23.01 80.5,23.01 80.5,22.01 81.5,22.01 82.5,22.01 83.5,22.01 82.5,21.01 81.5,21.01 80.5,21.01 79.5,21.01 79.5,22.01 67,22.01 66,22.01 65,22.01 64,22.01 63,22.01 67,21.01 66,21.01 65,21.01 64,21.01 63,21.01 70,16.01 69,16.01 68,16.01 64,16.01 63,16.01 62,16.01
  pour Top (rank 3, no thermals): 48.7,0.01 48.7,37.71 110,37.71 110,0.01
  pour Bottom (rank 3, no thermals): 0,37.41 110.1,37.41 110.1,-0.09 0,-0.09
  pour Top (rank 3, no thermals): -0.1,37.21 48.4,37.21 48.4,12.91 -0.1,12.91
  pour L2_GND (rank 3, no thermals): 0.1,37.41 58.9,37.41 58.9,0.21 0.1,0.21
  cutout Top: 37.3,21.41 39.6,21.41 39.7,21.31 39.7,18.51 37.3,18.51
  pour Top (rank 2, no thermals): 16.6,22.41 19,22.41 19,18.41 16.6,18.41
  cutout Top: 18.8,21.31 21.1,21.31 21.2,21.21 21.2,18.41 18.8,18.41
  pour Top (rank 2, no thermals): 34.9,22.31 37.3,22.31 37.3,18.31 34.9,18.31
AMUX_OUT
  Top 0.2: U3.24 67.5,62.89 67.6,62.99 67.6,63.88 66.57,64.91 65.1,64.91 64.5,64.31 61.6,64.31 52.32,55.02 48.33,55.02 46.6,56.75 46.6,57.81 46.09,58.31 U6.3
AMUX_S0  (via drill 0.3)
  Top 0.2: v77.97,59.24 78.47,59.74 78.47,62.15 U3.2 | U6.11 52.3,54.5 61.7,63.91 65.1,63.91 v65.45,64.26
  Bottom 0.2: v77.97,59.24 73.23,59.24 72.1,58.11 71.94,57.95 68.21,57.95 65.3,60.87 65.3,64.11 v65.45,64.26
AMUX_S1  (via drill 0.3)
  Top 0.2: v77.46,59.95 77.56,59.95 78.01,60.4 U3.3 | U6.10 51.52,53.23 61.8,63.51 65.8,63.51 66.35,64.06 v66.35,64.26
  Bottom 0.2: v77.46,59.95 73.44,59.95 72.85,59.36 71.79,58.31 68.4,58.31 65.69,61.02 65.69,63.46 66.42,64.19 v66.35,64.26
AMUX_S2  (via drill 0.3)
  Top 0.2: U3.4 77.5,60.91 v77.4,60.81 | U6.9 50.84,52.21 51.1,52.21 61.95,63.06 66.25,63.06 66.75,63.56 v66.95,63.56
  Bottom 0.2: v77.4,60.81 73.8,60.81 71.75,58.76 71.65,58.66 68.75,58.66 67.85,59.56 67.85,62.66 v66.95,63.56
B
  Top 0.2: U2.7 105.86,66.14 X15.1 108.54,68.82 X16.2
  Bottom 0.2: X15.1 103.67,66.78 TP4.P$1
BAT_IN
  pour Top (no thermals): 0.1,36.71 11.8,36.71 14.5,34.01 14.5,7.91 0.1,7.91
BAT_MEAS  (via drill 0.3)
  Top 0.2: R30.1 v21.3,57.01 R31.2 | U6.12 48.23,55.77 47,57.01 47,59.51 46.2,60.31 v41.9,60.31
  Bottom 0.2: v41.9,60.31 39.46,60.31 23.9,60.31 21.3,57.71 v21.3,57.01
BUMPER1  (via drill 0.3)
  Top 0.2: U3.82 84.1,51.51 84.5,51.91 97.35,51.91 98.05,52.61 98.7,52.61 101.3,55.21 101.3,56.51 102.5,57.71 R4.2 103.25,57.86 103.25,58.71 | 103.25,58.71 C1.1 | v102.3,59.11 102.85,59.11 103.25,58.71
  Bottom 0.2: TP10.P$1 103.7,60.51 v102.3,59.11
BUMPER2  (via drill 0.3)
  Top 0.2: U3.81 84.31,51.02 84.85,51.56 97.49,51.56 98.19,52.26 103.15,52.26 R2.2 103.2,53.36 C2.1 102.9,53.36 102.1,53.36 v102.1,53.41
  Bottom 0.2: TP11.P$1 102.3,53.41 v102.1,53.41
BUZZER  (via drill 0.3)
  Top 0.2: U3.77 79.69,49.01 v79.39,49.31 | v83.97,49.31 84.22,49.31 Q4.G 84.87,48.33 84.91,47.61 R29.1
  Bottom 0.2: 82.6,49.36 83.92,49.36 v83.97,49.31 | 82.6,49.36 79.44,49.36 v79.39,49.31 | TP23.P$1 82.5,49.26 82.6,49.36
CENTRAL_BRUSH_A  (via drill 0.3 pad 0.55, 0.35 pad 0.55)
  Top 0.2: MD_4:U1.1 87.4,23.93 88,23.33 88.72,23.33 v88.77,23.28 | U3.64 73.5,44.17 77.15,40.52 80.6,40.52 81.5,39.61 v81.5,38.46
  L2_GND 0.2: v88.77,23.28 88.77,24.14 90.51,25.87 90.51,31.3 84.69,37.12 82.6,37.12 81.5,38.22 v81.5,38.46
  Bottom 0.2: MD_4:TP3.P$1 76.2,41.31 79.76,41.31 81.5,39.57 v81.5,38.46
CENTRAL_BRUSH_B  (via drill 0.3 pad 0.55)
  Top 0.2: MD_4:U1.2 86.87,24.51 87.8,24.51 88.4,23.91 v89.7,23.91 | U3.78 81.6,49.51 82.94,48.17 82.94,40.22 82.44,39.72 v82.44,38.62
  L2_GND 0.2: v89.7,23.91 89.7,24.57 90.88,25.74 90.88,31.43 84.84,37.47 83.05,37.47 82.44,38.08 v82.44,38.62
  Bottom 0.2: v82.44,38.62 82.44,39.86 82.73,40.15 82.73,42.22 81.5,43.45 MD_4:TP4.P$1
CENTRAL_BRUSH_CURRENT  (via drill 0.35 pad 0.55)
  Top 0.2: MD_4:U1.6 87.87,27.18 v88.35,27.66 | U3.34 62.68,56.5 58.52,52.34 58.52,52.31
  Top 0.203: MD_4:R2.1 88.39,27.71 v88.35,27.66 | v57.49,42.31 57.49,43.5 58.52,44.52 58.52,52.31
  Bottom 0.2: v57.49,42.31 57.47,42.34 57.47,43.12 55.58,45.01 MD_4:TP7.P$1 | 85.3,36.51 89.8,32.01